# Altium PCB xbowtie.PcbDoc (part 1 of 3)
Units mil, origin at the board's own origin, x right, y up, seen from the top; angles counter-clockwise.
Board outline 3822.83 x 3919.29 mil, 4 copper layers (Top Layer, GND, POWER, Bottom Layer), stack 53.912 mil thick; 127 components, 86 nets, 452 pads, 412 vias.
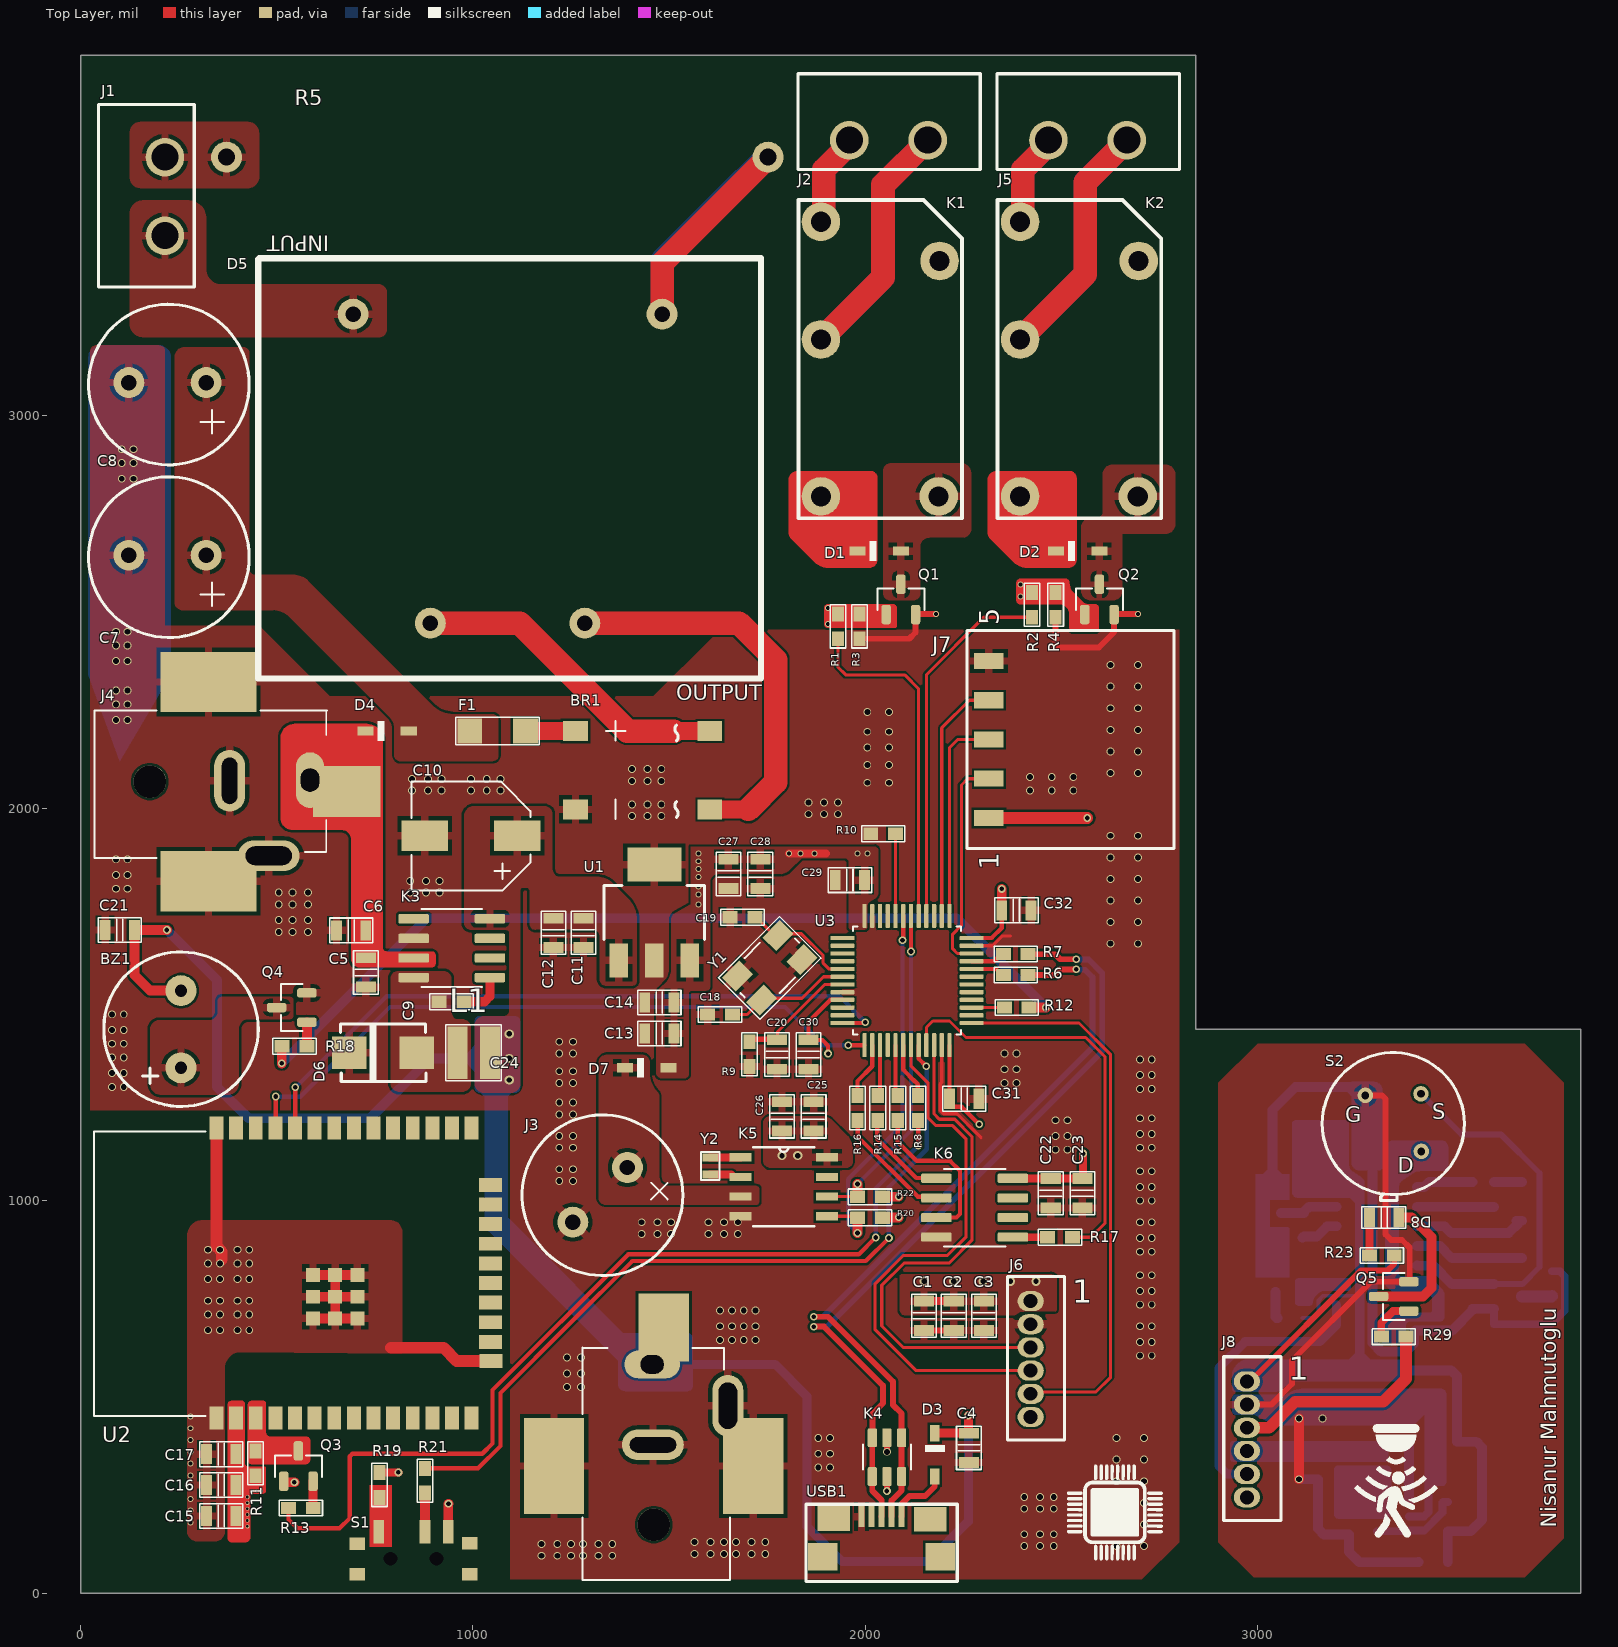
[diagram p0: Top Layer view]
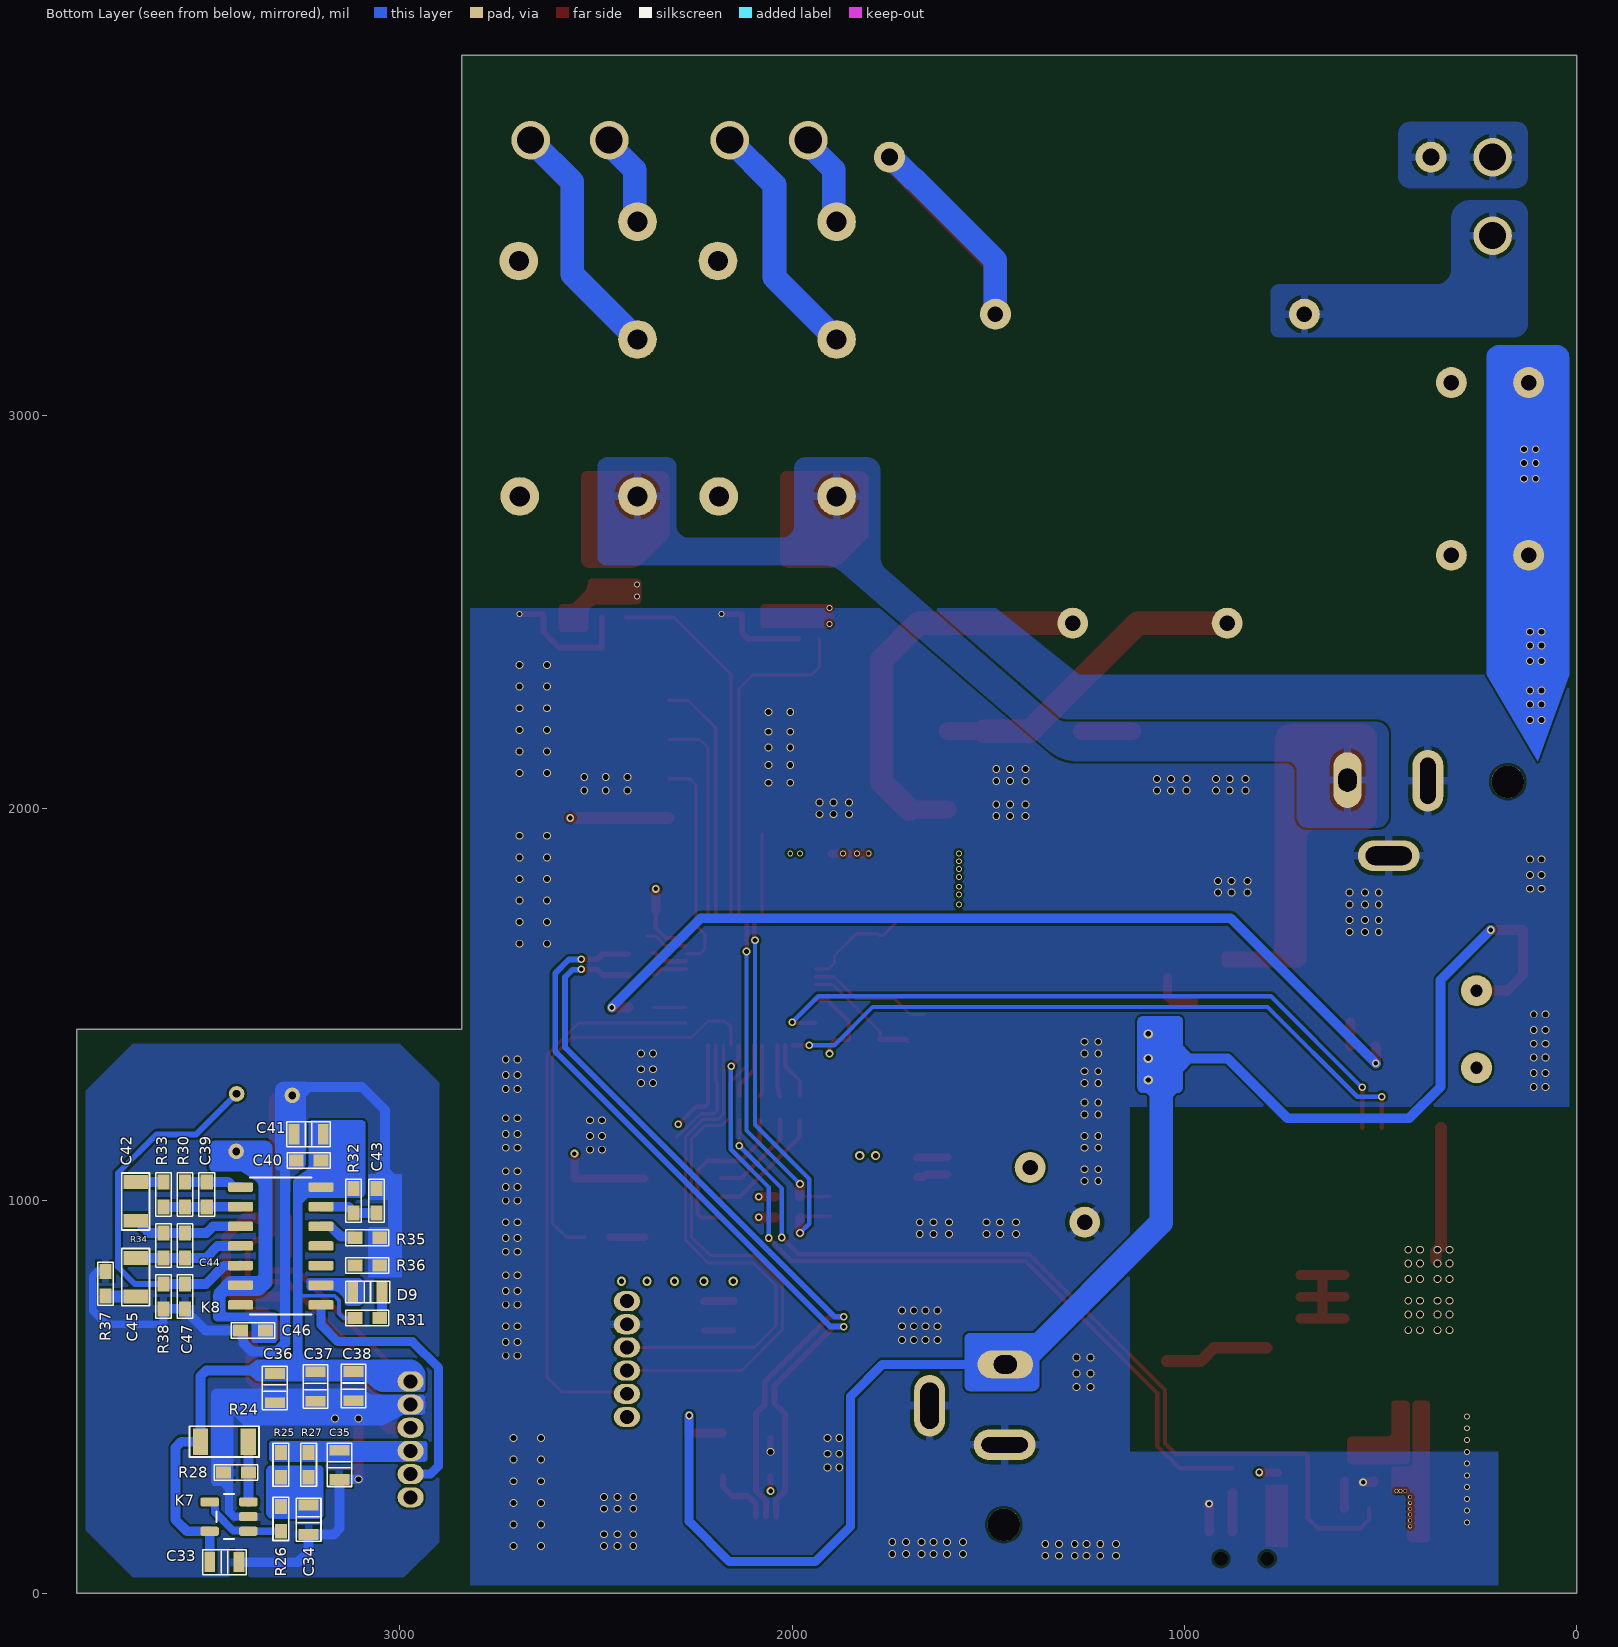
[diagram p1: Bottom Layer view, seen from below]
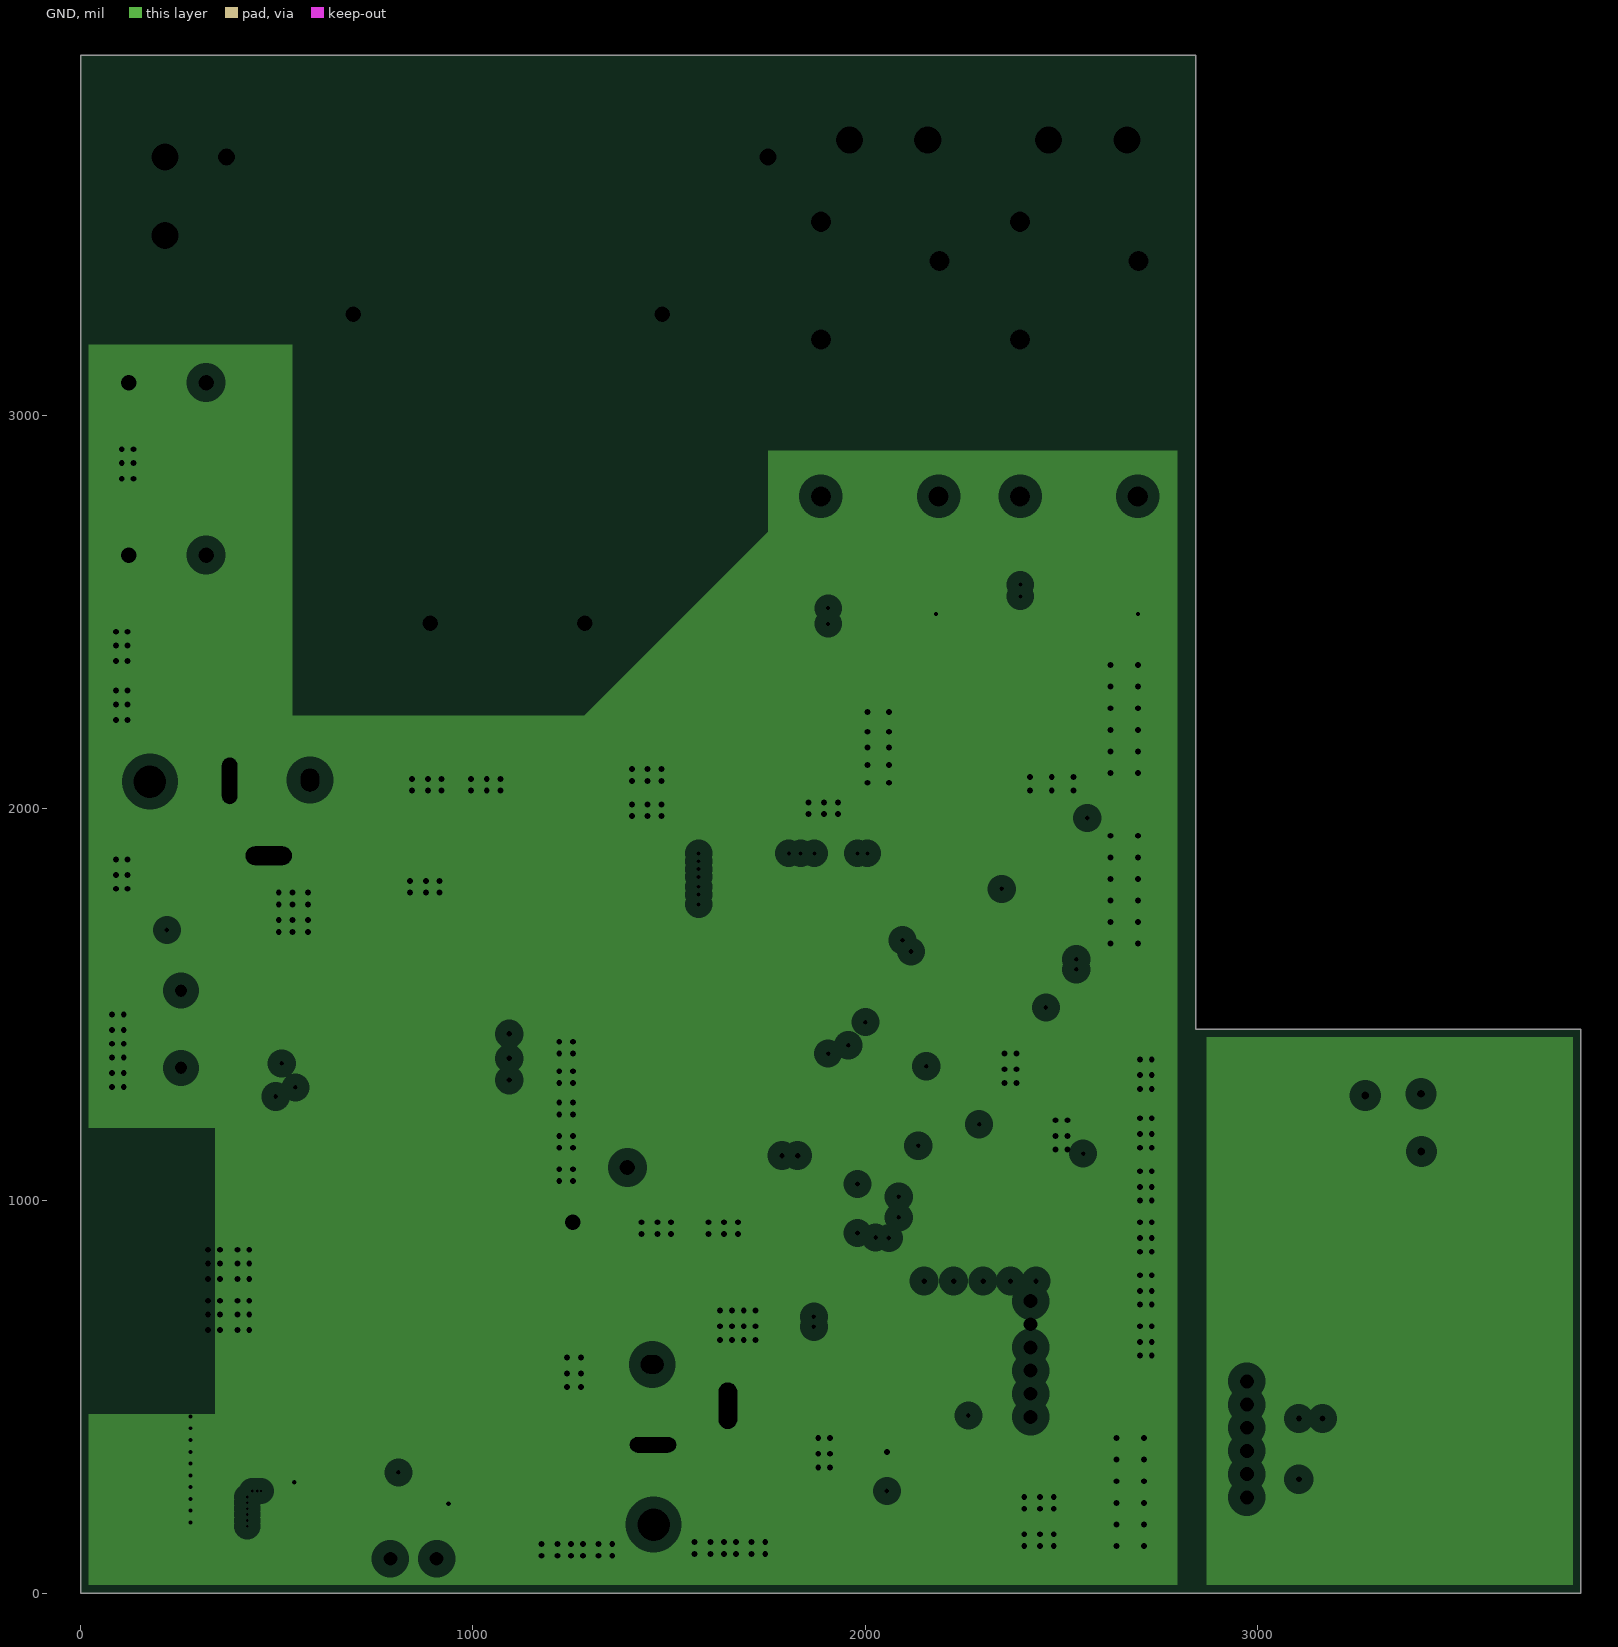
[diagram p2: GND, clearances drawn from the general rule]
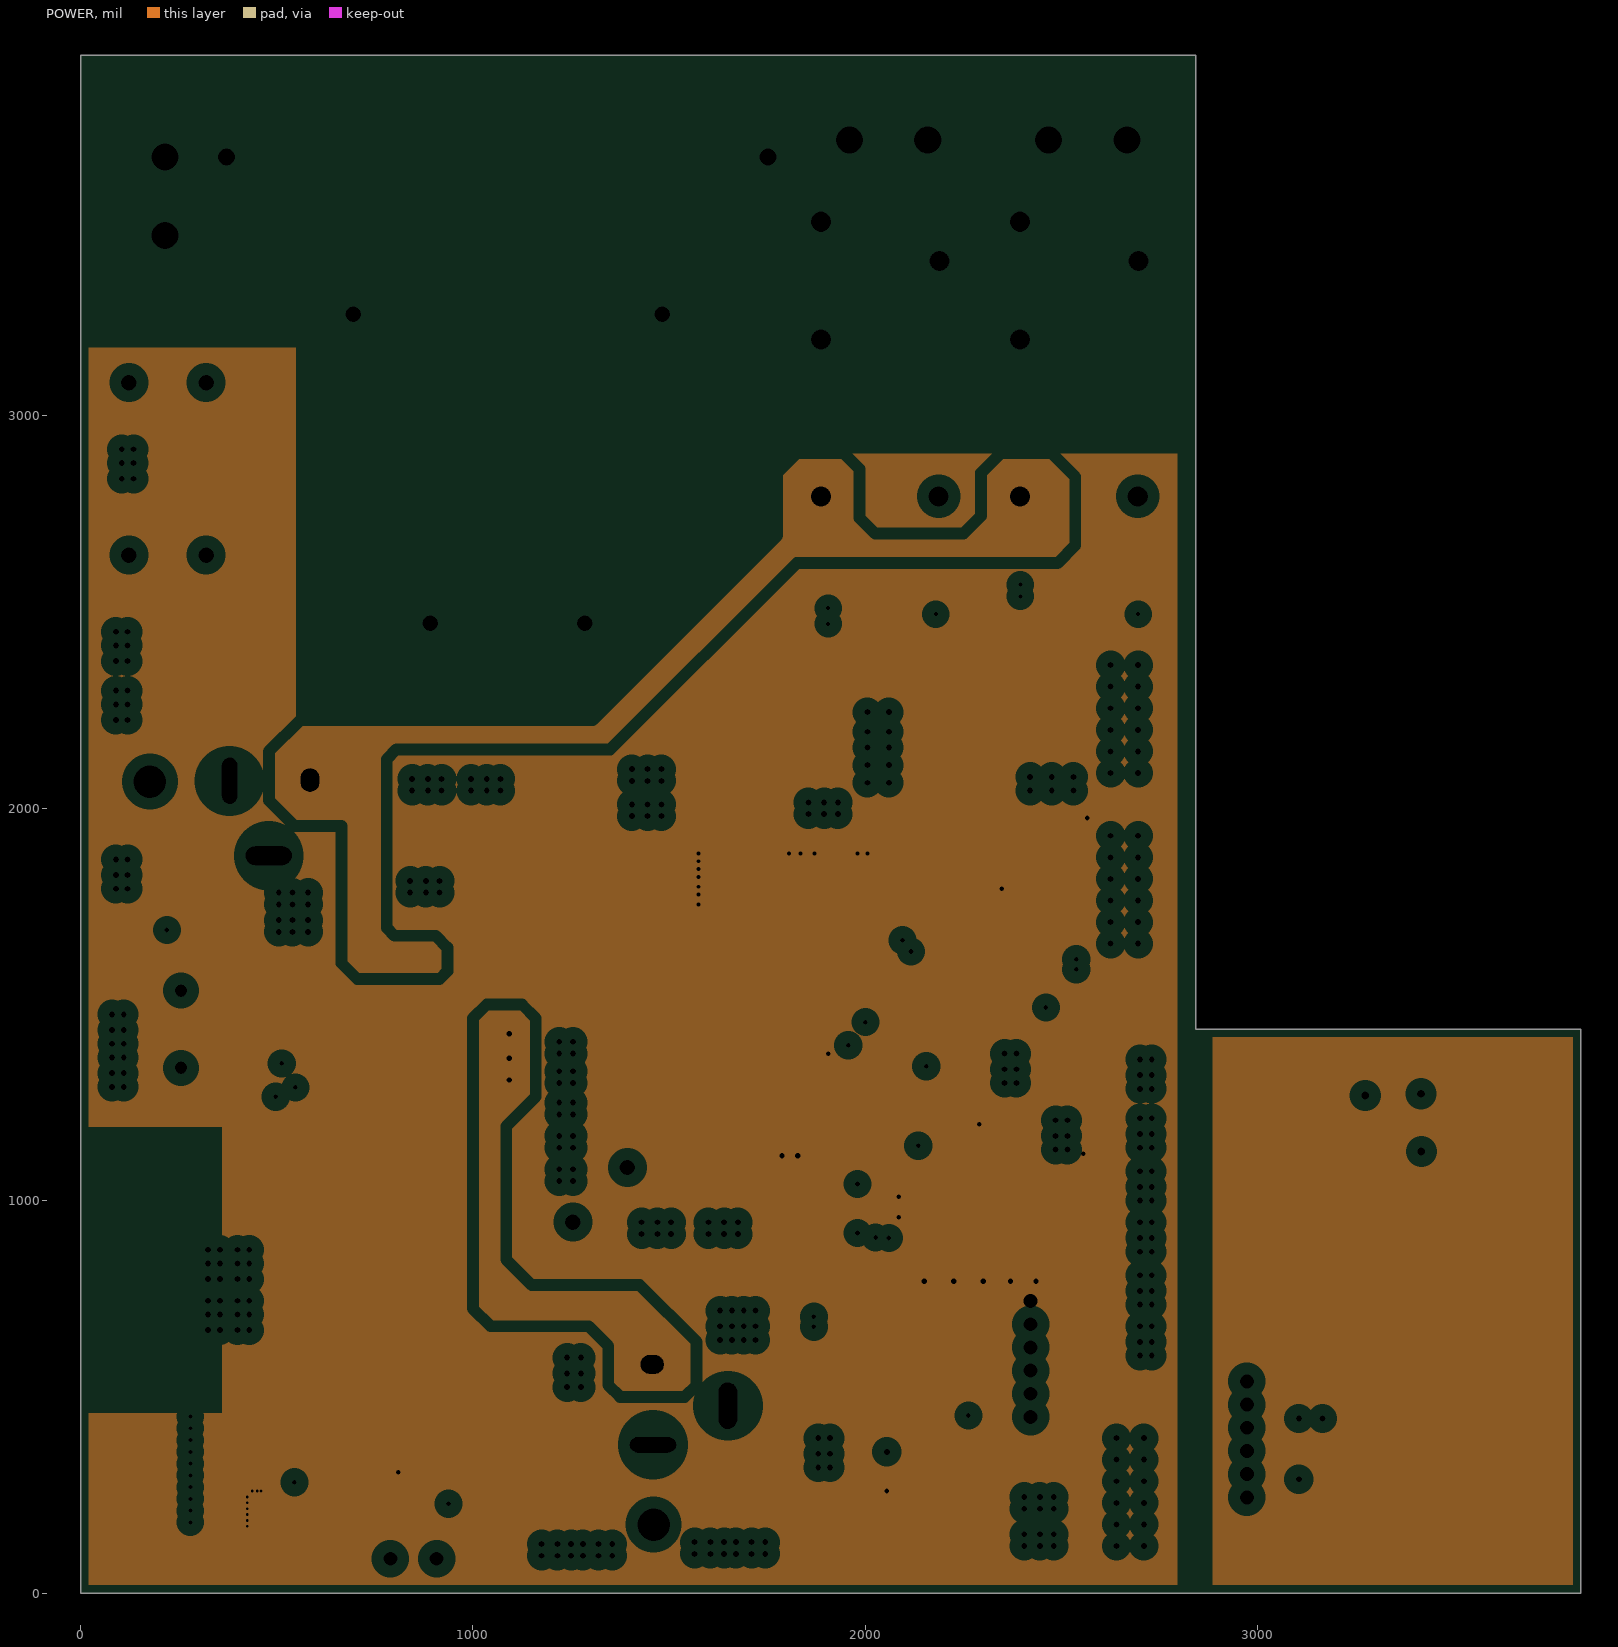
[diagram p3: POWER, clearances drawn from the general rule]
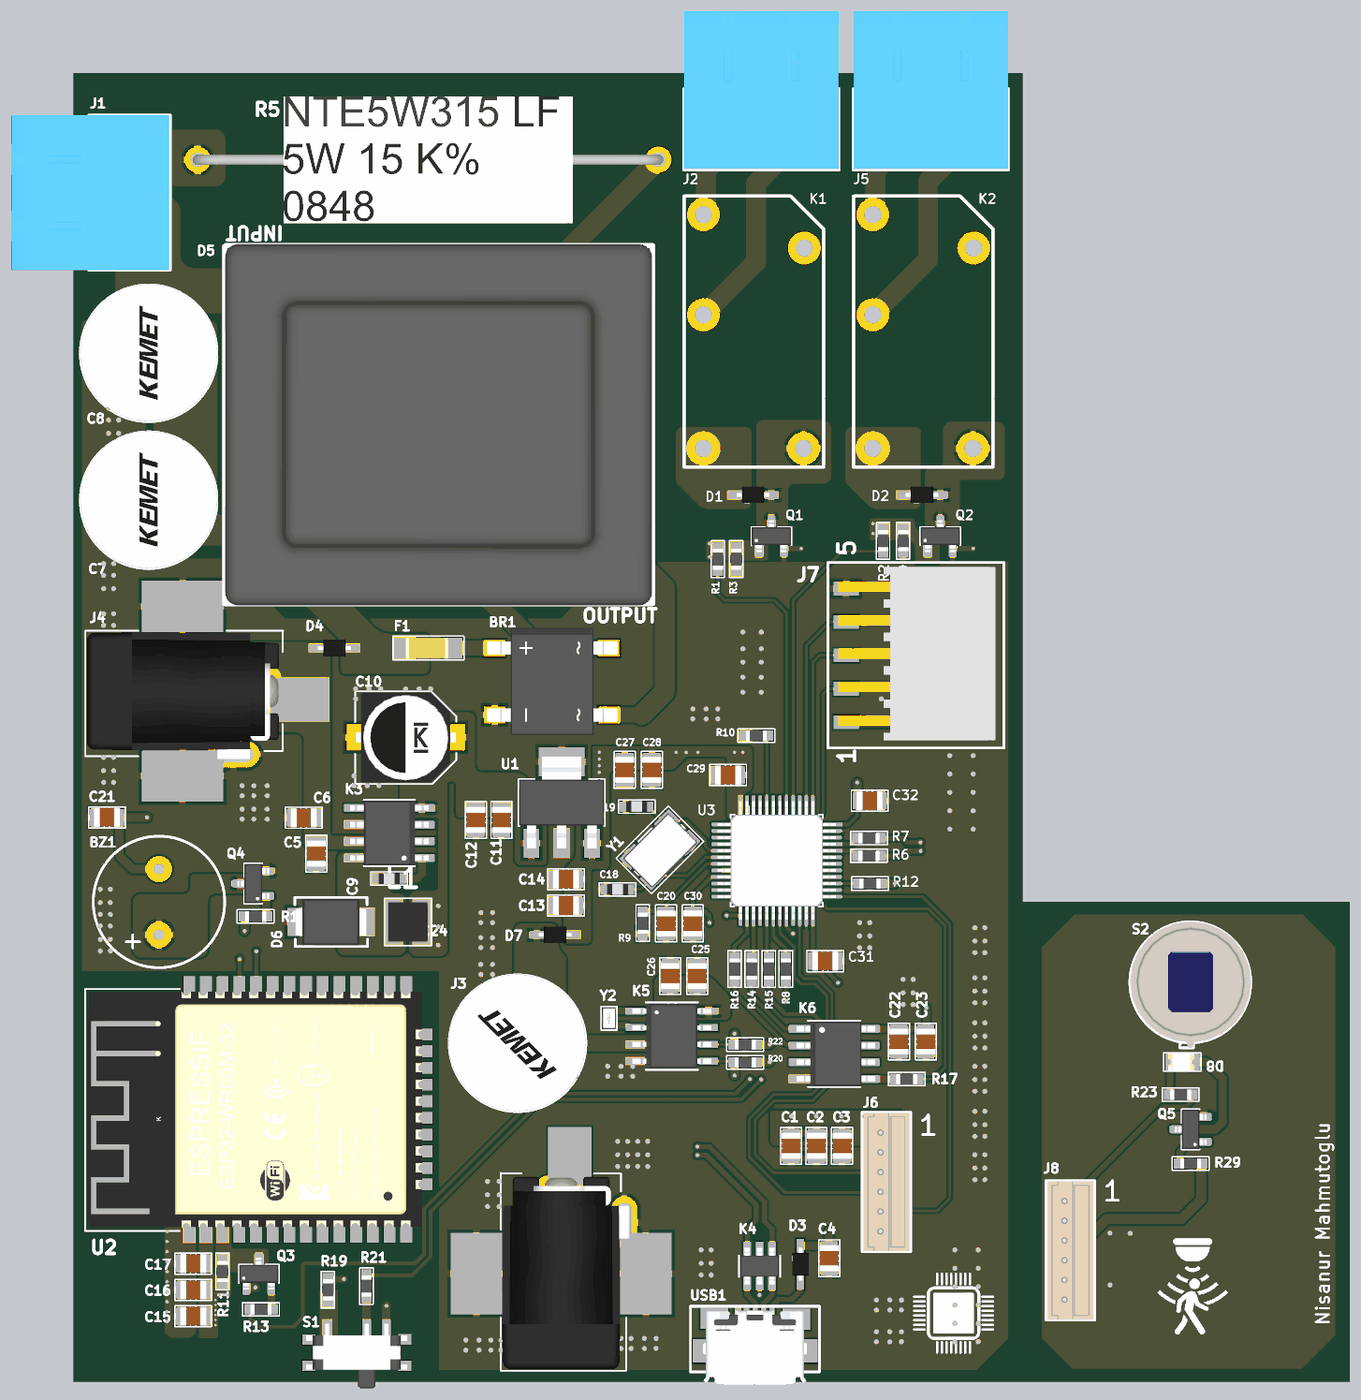
[diagram p5: 3D render of the assembled board from above, using the file's embedded part models]
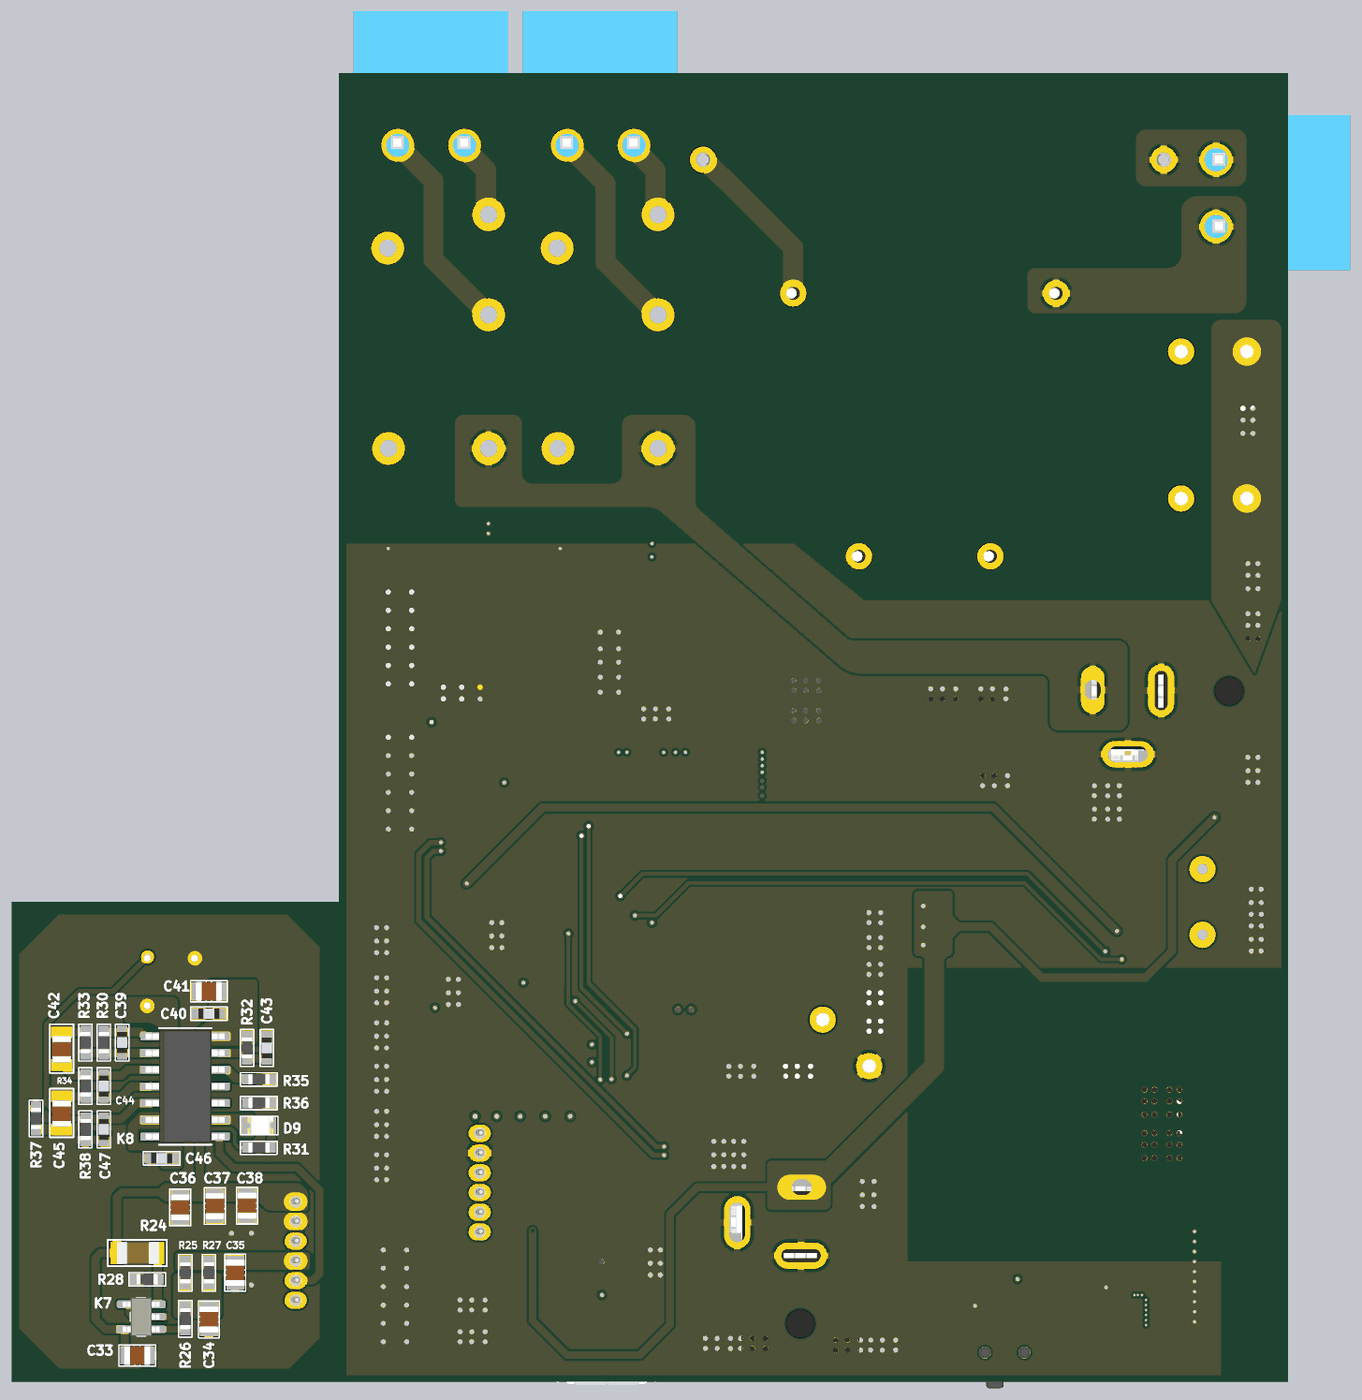
[diagram p6: 3D render of the assembled board from below, using the file's embedded part models]

## Layer stack, top to bottom
Top Solder: solder mask 1, SM-001, Dk 4
Top Layer: signal copper 1.378
Dielectric 1: prepreg 5.1, PP-017, Dk 4.3
Dielectric 2: prepreg 5.1, PP-017, Dk 4.3
GND: plane copper 1.378, net GND
Dielectric 3: core 28, Core-039, Dk 4.8
POWER: plane copper 1.378, net (Multiple Nets)
Dielectric 4: prepreg 5.1, PP-017, Dk 4.3
Dielectric 5: prepreg 5.1, PP-017, Dk 4.3
Bottom Layer: signal copper 1.378
Bottom Solder: solder mask 1, SM-001, Dk 4

## Board outline
0,0 3822.83,0 3822.83,1437.01 2842.52,1437.01 2842.52,3919.29 0,3919.29

## Design rules (kind name [scope] priority, off if disabled: settings)
Clearance [All] p1: gap=0 ignorepadtopadclearanceinfootprint=TRUE
ComponentClearance [All] p1: gap=5 collisioncheckmode=3 verticalgap=0 showdistances=FALSE
DiffPairsRouting [All] p1: maxlimit=10 minlimit=10 mostfreqgap=10 toplayer_minwidth=15 toplayer_maxwidth=15 toplayer_prefwidth=15 bottomlayer_minwidth=15 bottomlayer_maxwidth=15 bottomlayer_prefwidth=15 maxuncoupledlength=500
MinimumSolderMaskSliver [All] p1: minsoldermaskwidth=5
PlaneClearance [All] p1: clearance=30
PlaneConnect [All] p1: planeconnectstyle=Relief reliefexpansion=20 reliefentries=4 reliefconductorwidth=15 reliefairgap=10
PolygonConnect [All] p1: connectstyle=Relief reliefconductorwidth=20 reliefentries=4 polygonreliefangle="90 Angle" airgapwidth=10
RoutingVias [All] p1: holewidth=11.81 width=19.68 viastyle="Through Hole" minholewidth=9.84 minwidth=15.75 maxholewidth=28 maxwidth=50
SilkToSolderMaskClearance [IsPad] p1: minsilkscreentomaskgap=5 clearancetoexposedcopper=TRUE
SolderMaskExpansion [All] p1: expansion=1.99 istentingtop=FALSE
Width [All] p1: maxlimit=90 minlimit=8 preferedwidth=10 minimp=50.000000 maximp=50.000000 favimp=50.000000
24 further rules are at their usual default settings.

## Classes and differential pairs
component class xbowtie3: C33 C34 C35 C36 C37 C38 C39 C40 C41 C42 C43 C44 C45 C46 C47 D8 D9 J8 K7 K8 Q5 R23 R24 R25 R26 R27 R28 R29 R30 R31 R32 R33 R34 R35 R36 R37 R38 S2
component class xbowtie2: BZ1 C15 C16 C17 C18 C19 C20 C21 C22 C23 C24 C25 C26 C27 C28 C29 C30 C31 C32 D7 K4 K5 K6 Q3 Q4 R6 R7 R8 R9 R10 R11 R12 R13 R14 R15 R16 R17 R18 R19 R20 R21 R22 S1 U2 U3 Y1 Y2
component class xbowtie1: BR1 C1 C2 C3 C4 C5 C6 C7 C8 C9 C10 C11 C12 C13 C14 D1 D2 D3 D4 D5 D6 F1 J1 J2 J5 J6 J7 K1 K2 K3 L1 Q1 Q2 R1 R2 R3 R4 R5 U1 USB1
differential pair USB: +USB_P -USB_N

## Components (designator, comment, footprint, x,y, rotation, side; value= is the part's Value field where it differs from the comment)
BR1 "DB105STR" DB105STR 1603.78,1997.13 r90 top
BZ1 "CMI-9605IC-0580T" CMI-9605IC 255.91,1437.01 r180 top
C1 "4.7uF" "CAP_CER 0805" 2149.61,706.69 r90 top
C2 "4.7uF" "CAP_CER 0805" 2225.39,706.69 r90 top
C3 "CAP CER 1uF 0805" "CAP_CER 0805" 2302.17,706.69 r90 top
C4 "4.7uF" "CAP_CER 0805" 2263.78,370.08 r90 top
C5 "1uF" "CAP_CER 0805" 727,1581.6 r90 top
C6 "100nF" "CAP_CER 0805" 689.6,1689 r0 top
C7 "ESH477M050AH4AA" ESH477 320,2645 r180 top
C8 "ESH477M050AH4AA" ESH477 320,3085 r180 top
C9 "Comment" CAP_0603 945.16,1506.99 r180 top
C10 "68uF" "CAP ALU 68 UF" 995,1930 r180 top
C11 "CAP CER 1uF 0805" "CAP_CER 0805" 1281.77,1682.6 r90 top
C12 "100nF" "CAP_CER 0805" 1205,1682.6 r90 top
C13 "CAP CER 4.7uF 0805" "CAP_CER 0805" 1475.1,1426.26 r0 top
C14 "CAP CER 1uF 0805" "CAP_CER 0805" 1475.1,1505 r0 top
C15 "CAP CER 4.7uF 0805" "CAP_CER 0805" 358.6,196.52 r0 top
C16 "1uF" "CAP_CER 0805" 358.6,275.26 r0 top
C17 "100nF" "CAP_CER 0805" 358.6,354 r0 top
C18 "20pF" ? 1629.54,1474.41 r0 top
C19 "20pF" ? 1687,1722.44 r0 top
C20 "100nF" "CAP_CER 0805" 1775,1372.6 r270 top
C21 "100nF" "CAP_CER 0805" 100,1690 r0 top
C22 "100nF" "CAP_CER 0805" 2472.44,1018.9 r90 top
C23 "100nF" "CAP_CER 0805" 2553.15,1018.9 r90 top
C24 "ESH477M050AH4AA" ESH477 1393.7,1084.65 r225 top
C25 "100nF" "CAP_CER 0805" 1868.21,1214.9 r270 top
C26 "1uF" "CAP_CER 0805" 1787.5,1214.9 r270 top
C27 "CAP CER 4.7uF 0805" "CAP_CER 0805" 1650.94,1832.68 r90 top
C28 "1uF" "CAP_CER 0805" 1732.28,1832.68 r90 top
C29 "100nF" "CAP_CER 0805" 1960.63,1816.93 r0 top
C30 "100nF" "CAP_CER 0805" 1855,1372.6 r90 top
C31 "100nF" "CAP_CER 0805" 2251.97,1259.72 r180 top
C32 "100nF" "CAP_CER 0805" 2385,1740 r180 top
C33 "100nF" "CAP_CER 0805" 3446.85,78.74 r0 bottom
C34 "4.7uF" "CAP_CER 0805" 3232.28,187.01 r90 bottom
C35 "CAP CER 1uF 0805" "CAP_CER 0805" 3153.54,326.77 r90 bottom
C36 "4.7uF" "CAP_CER 0805" 3318.54,522.52 r90 bottom
C37 "4.7uF" "CAP_CER 0805" 3214.53,526.46 r90 bottom
C38 "CAP CER 1uF 0805" "CAP_CER 0805" 3118.11,527.56 r90 bottom
C39 "10nF" ? 3492.13,1015.75 r90 bottom
C40 "CAP CER 100nF 0603" ? 3232.29,1102.36 r180 bottom
C41 "CAP CER 1uF 0805" "CAP_CER 0805" 3232.41,1169.29 r180 bottom
C42 "33uF" "CAP 1206" 3673.23,948.82 r90 bottom
C43 "CAP CER 100nF 0603" ? 3059.06,1000 r270 bottom
C44 "10nF" ? 3547.24,885.83 r270 bottom
C45 "33uF" "CAP 1206" 3673.23,755.91 r90 bottom
C46 "CAP CER 100nF 0603" ? 3374.01,669.29 r180 bottom
C47 "CAP CER 100nF 0603" ? 3547.24,755.9 r90 bottom
D1 "1N4148WS" 1N4148WS 2035.43,2655.51 r0 top
D2 "1N4148WS" 1N4148WS 2541.34,2655.51 r0 top
D3 "1N4148WS" 1N4148WS 2177.17,352.36 r270 top
D4 "1N4148WS" 1N4148WS 781.5,2196.85 r0 top
D5 "BV302S12010_ZU" BV302S 1088.23,2865.59 r0 top
D6 "1SMB5919BT3G" 1SMB5919BT3G 770.98,1377 r0 top
D7 "1N4148WS" 1N4148WS 1442.91,1338.58 r0 top
D8 "LED RED 0805" "LED 805" 3322.4,957.5 r180 top
D9 "LED GREEN" "LED 805" 3082.56,767.72 r180 bottom
F1 "FUSE 3413.0216.22" "FUSE 3413.0216.22" 1133.78,2197.13 r180 top
J1 "TBP01R1-508-02BE" TBP01R1-508 215,3559.29 r270 top
J2 "TBP01R1-508-02BE" TBP01R1-508 2059.06,3702.76 r180 top
J3 "Comment" JACK 1474.41,344.49 r90 top
J4 "Comment" JACK 346.54,2054.25 r0 top
J5 "TBP01R1-508-02BE" TBP01R1-508 2566.54,3702.76 r180 top
J6 "64800611622" 64800611622 2421.26,596.46 r270 top
J7 "SMH-105-02-LS" "5 PIN CONNECTOR" 2534.42,2175.41 r90 top
J8 "64800611622" 64800611622 2972.44,391.73 r270 top
K1 "ALQ112" ALQ112 2037.99,3144.88 r90 top
K2 "ALQ112" ALQ112 2545.47,3144.88 r90 top
K3 "LM2675MX-12/NOPB" LM2675MX-12/NOPB 946.06,1643.5 r180 top
K4 "USBLC6-2SC6" USBLC6-2SC6 2055.12,346.46 r270 top
K5 "M41T00M6F" M41T00M6F 1789.37,1035.43 r0 top
K6 "MAX6662" "MAKSİMUMA 6662MSA+" 2278.54,982.09 r0 top
K7 "OPA314AIDBVR" OPA314AIDBVR 3435.24,194.88 r0 bottom
K8 "NCS36000DRG" NCS36000DRG 3303.35,884.65 r180 bottom
L1 "78438335470" IND_1212 1001.66,1377 r0 top
Q1 "MMBT3904-7-F" MMBT3904-7-F 2090.55,2532.28 r90 top
Q2 "MMBT3904-7-F" MMBT3904-7-F 2596.46,2532.28 r90 top
Q3 "MMBT3904-7-F" MMBT3904-7-F 555.12,323.62 r90 top
Q4 "MMBT3904-7-F" MMBT3904-7-F 538.19,1492.13 r180 top
Q5 "MMBT3904-7-F" MMBT3904-7-F 3346.46,755.91 r180 top
R1 "1K" RES_0603 1930,2463.5 r90 top
R2 "1K" RES_0603 2425,2518.5 r90 top
R3 "10K" RES_0603 1985,2463.5 r90 top
R4 "10K" RES_0603 2485,2518.5 r90 top
R5 "5WD27" 5WD27 372.05,3659.45 r0 top
R6 "15R" RES_0603 2383.11,1575.39 r0 top
R7 "15R" RES_0603 2383.11,1628.54 r0 top
R8 "100R" RES_0603 2133.86,1236.22 r270 top
R9 "100R" RES_0603 1705,1373.5 r90 top
R10 "100R" RES_0603 2045.27,1935.04 r0 top
R11 "1K" RES_0603 446,330.5 r90 top
R12 "100R" RES_0603 2385.83,1492.13 r0 top
R13 "100R" RES_0603 561.5,217 r0 top
R14 "100R" RES_0603 2031.5,1236.22 r90 top
R15 "100R" RES_0603 2082.68,1236.22 r90 top
R16 "100R" RES_0603 1980.32,1236.22 r90 top
R17 "100R" RES_0603 2495.94,906.69 r0 top
R18 "100R" RES_0603 545.27,1393.7 r0 top
R19 "100R" RES_0603 761.81,275.59 r90 top
R20 "4K7R" RES_0603 2011.82,956.69 r0 top
R21 "100R" RES_0603 877.5,286.5 r270 top
R22 "4K7R" RES_0603 2011.82,1009.84 r0 top
R23 "100R" RES_0603 3316.5,860 r0 top
R24 "TFPT1206L1002FM" TFPT1206L1002FM 3444.88,385.83 r0 bottom
R25 "220K" RES_0603 3303.15,326.77 r90 bottom
R26 "1K" RES_0603 3303.15,188.97 r90 bottom
R27 "220K" RES_0603 3232.28,326.77 r90 bottom
R28 "10K" RES_0603 3417.33,307.09 r0 bottom
R29 "1K" RES_0603 3346.46,653.54 r180 top
R30 "560K" RES_0603 3547.24,1015.75 r90 bottom
R31 "1K" RES_0603 3082.68,700.79 r0 bottom
R32 "220K" RES_0603 3118.11,1000 r90 bottom
R33 "10K" RES_0603 3602.36,1015.75 r270 bottom
R34 "560K" RES_0603 3602.36,885.82 r90 bottom
R35 "0R" RES_0603 3082.67,905.51 r0 bottom
R36 "0R" RES_0603 3082.67,834.65 r0 bottom
R37 "10K" RES_0603 3750,788.5 r270 bottom
R38 "43K" RES_0603 3602.36,755.9 r90 bottom
S1 "EG1215AA" EG1215AA 848.44,87.5 r0 top
S2 "LHI 878/3902" "LHI 878" 3345,1197.5 r0 top
U1 "AP7361-33E-13" AP7361-33E-13 1462.32,1734.49 r90 top
U2 "ESP32-WROOM-32E (4MB)" ESP32-32E 696.06,813.78 r90 top
U3 "STM32F103C6T6A" STM32 2106.3,1561.02 r0 top
USB1 "10118192-0001LF" MICRO_B_USB 2041.34,194.88 r0 top
Y1 "CRYSTAL 16MHz" ECS 1756.46,1593.29 r45 top
Y2 "CRYSTAL 32.7680KHZ 12.5PF SMD" ABS05 1604.33,1088.58 r90 top

## Footprints (in the part's own frame and the unit in brackets; to place one, negate y for a bottom-side part, rotate by r counter-clockwise, add the part's x,y. Pads: shape width x height; smd on the part's side, far side on the other; paste and mask are expansions set on the pad)
1N4148WS [mm]
  rect 1.05x0.6 smd: 1(-1.4,0) 2(1.4,0)
  silkscreen extent -0.63,-0.63 -0.2,0.63, body extent -1.25,-0.62 1.25,0.64, height 1
1SMB5919BT3G [mm]
  rect 2.25x2.12 smd mask+0.05: 1(-2.185,0) 2(2.185,0)
  silkscreen extent -2.75,-1.87 2.79,1.87, body extent -2.72,-1.78 2.72,1.78, height 2.49
"5 PIN CONNECTOR" [mm]
  rect 1.04x1.91 smd mask+0: 1(-5.08,5.577) 2(-2.54,5.577) 3(0,5.577) 4(2.54,5.577) 5(5.08,5.577)
  silkscreen extent -7.05,-6.4 7.05,6.98, body extent -6.48,-5.76 6.73,6.17, height 2.45
5WD27 [mm]
  round 2 hole 1.1 paste-2539.97 mask+0.076: 1(0,0) 2(35.052,0)
  body extent -0.37,-4.82 35.43,4.83, height 10.07
64800611622 [mm]
  oval 1.3x1.7 hole 0.9 mask+0.05: 1(-3.75,0) 2(-2.25,0) 3(-0.75,0) 4(0.75,0) 5(2.25,0) 6(3.75,0)
  silkscreen extent -5.35,-1.5 5.25,2.2, body extent -5.3,-1.4 5.2,2.1, height 4.55
ABS05 [mm]
  rect 0.5x1 smd mask+0.05: 1(-0.55,0) 2(0.55,0)
  silkscreen extent -0.9,-0.6 0.9,0.6, body extent -0.8,-0.5 0.8,0.5, height 0.5
ALQ112 [mm]
  round 2.5 hole 1.3 mask+0.05: 1(6.35,-3.84) 2(1.27,3.84) 3(8.89,3.84) 4(-8.89,-3.78) 5(-8.89,3.84)
  silkscreen extent -10.3,-5.3 10.3,5.3, body extent -10.1,-4.9 9.9,5.1, height 15.6
AP7361-33E-13 [mm]
  rect 2.2x1.2 smd: 1(-3.1,2.3) 2(-3.1,0) 3(-3.1,-2.3)
  rect 2.2x3.5 smd: ""(3.1,0)
  silkscreen extent -1.75,-3.25 1.75,3.25, body extent -3.5,-3.25 3.5,3.25, height 1.65
BV302S [mm]
  round 2 hole 1 mask+0.05: 1(10,10) 5(-10,10) 7(-5,-10) 9(5,-10)
  silkscreen extent -16.14,-13.59 16.41,13.62, body extent -16.12,-13.74 16.38,13.76, height 21.8
"CAP 1206" [mm]
  rect 0.9x1.6 smd paste-2539.97 mask+0.05: 1(0,0) 2(2.5,0)
  silkscreen extent -0.6,-0.9 3.1,0.9, body extent 0.2,-0.72 2.2,0.72, height 1.24
"CAP ALU 68 UF" [mm]
  rect 3x2 smd paste-2539.97 mask+0.076: 1(-3,0) 2(3,0)
  silkscreen extent -3.85,-3.5 3.85,3.55, body extent -3.8,-3.37 3.8,3.43, height 5.66
CAP_0603 [mil]
  rect 38x31 smd mask+1.97: 1(-31.5,0) 2(31.5,0)
  silkscreen extent -55,-20 55,20, body extent -31,-16 32,16, height 31
"CAP_CER 0805" [mm]
  rect 0.7x1.3 smd mask+0.05: 1(-0.95,0) 2(0.95,0)
  silkscreen extent -1.4,-0.8 1.4,0.8, body extent -1,-0.72 1,0.72, height 1.23
CMI-9605IC [mm]
  round 2 hole 0.8 mask+0.05: 1(0,2.5) 2(0,-2.5)
  silkscreen extent -5,-5 5,5, body extent -4.8,-4.8 4.8,5.4, height 5.2
DB105STR [mm]
  rect 1.3x1.6 smd paste-2539.97 mask+0.076: 1(5.08,0) 2(0,0) 3(5.08,8.7) 4(0,8.7)
  silkscreen extent -0.64,2.05 5.71,6.73, body extent -1.54,-0.63 6.62,9.27, height 2.7
ECS [mm]
  rect 1.6x1.25 smd: 1(-1.85,-1.1) 2(1.85,-1.1) 3(1.85,1.1) 4(-1.85,1.1)
  silkscreen extent -2.8,-1.9 2.8,1.9, body extent -2.5,-1.65 2.5,1.55, height 0.85
EG1215AA [mm]
  round 0 hole 0.9 mask+0.05: 0(-1.5,0) 0(1.5,0)
  rect 0.7x1.5 smd mask+0.05: 1(-2.25,1.75) 2(0.75,1.75) 3(2.25,1.75)
  rect 1x0.8 smd mask+0.05: "  "(-3.65,-1) "  "(-3.65,0.981) "  "(3.65,-1) "  "(3.65,1)
  body extent -3.85,-2.7 3.85,2.2, height 1.4
ESH477 [mm]
  round 2 hole 1 paste-2539.97 mask+0.076: 1(0,0) 2(5,0)
  silkscreen extent -2.79,-5.07 7.61,5.33, body extent -2.84,-5.17 7.66,5.33, height 22.07
ESP32-32E [mm]
  rect 1.5x0.9 smd mask+0.05: 1(-9.33,8.88) 1(-9.33,8.88) 2(-9.33,7.61) 2(-9.33,7.61) 3(-9.33,6.34) 3(-9.33,6.34) 4(-9.33,5.07) 4(-9.33,5.07) 5(-9.33,3.8) 5(-9.33,3.8) 6(-9.33,2.53) 6(-9.33,2.53) 7(-9.33,1.26) 7(-9.33,1.26) 8(-9.33,-0.01) 8(-9.33,-0.01) 9(-9.33,-1.28) 9(-9.33,-1.28) 10(-9.33,-2.55) 10(-9.33,-2.55) 11(-9.33,-3.82) 11(-9.33,-3.82) 12(-9.33,-5.09) 12(-9.33,-5.09) 13(-9.33,-6.36) 13(-9.33,-6.36) 14(-9.33,-7.63) 14(-9.33,-7.63) 25(9.43,-7.63) 26(9.43,-6.36) 27(9.43,-5.09) 28(9.43,-3.82) 29(9.43,-2.55) 30(9.43,-1.28) 31(9.43,-0.01) 32(9.43,1.26) 33(9.43,2.53) 34(9.43,3.8) 35(9.43,5.07) 36(9.43,6.34) 37(9.43,7.61) 38(9.43,8.88)
  rect 0.9x1.5 smd mask+0.05: 15(-5.65,-8.88) 16(-4.41,-8.86) 17(-3.14,-8.86) 18(-1.87,-8.86) 19(-0.6,-8.86) 20(0.67,-8.86) 21(1.94,-8.86) 22(3.21,-8.86) 23(4.48,-8.86) 24(5.75,-8.86)
  rect 0.9x0.9 smd mask+0.05: 39(-2.89,1.2) 40(-1.49,1.2) 41(-0.09,1.2) 42(-2.896,-0.233) 43(-1.49,-0.233) 44(-0.09,-0.233) 45(-2.89,2.633) 46(-1.49,2.633) 47(-0.09,2.633)
  silkscreen extent -9.2,9.6 9.2,16.8, body extent -8.9,-8.85 9,16.55, height 2.61
"FUSE 3413.0216.22" [mm]
  rect 1.6x1.6 smd mask+0.05: 1(0,0) 2(3.6,0)
  silkscreen extent -0.9,-0.9 4.5,0.9, body extent 0.31,-0.8 3.5,0.8, height 0.6
IND_1212 [mm]
  rect 1.3x3.4 smd mask+0.05: 1(-1.05,0) 2(1.05,0)
  silkscreen extent -1.8,-1.8 1.8,1.8, body extent -1.5,-1.5 1.5,1.5, height 1.2
JACK [mm]
  rect 4.4x3.3 smd: 1A(8.428,-0.3)
  oval 1.8x3.6 hole 1.2 slot 1.5 at 90 deg: 1B(6.05,0.45)
  rect 6.2x3.9 smd: 2A(-0.522,6.8) 3A(-0.522,-6.1)
  oval 2x4 hole 1 slot 3 at 90 deg: 2B(0.85,0.4)
  oval 4x2 hole 1.2 slot 3 at 0 deg: 3B(3.378,-4.45)
  round 2.1 hole 2.1 unplated: ""(-4.322,0.35)
  silkscreen extent -7.9,-4.6 7.15,4.95, body extent -7.78,-4.93 6.84,4.84, height 10.38
"LED 805" [mm]
  rect 0.7x1.3 smd mask+0.05: 1(-0.95,0) 2(0.95,0)
  silkscreen extent -1.4,-0.7 1.45,0.7, body extent -0.9,-0.65 1.1,0.65, height 0.8
"LHI 878" [mm]
  round 1 hole 0.5: 1(1.83,-1.825) 2(1.8,1.9) 3(-1.8,1.8)
  silkscreen extent -4.59,-5.01 4.61,4.57, body extent -4.56,-5.03 4.64,4.6, height 4.6
LM2675MX-12/NOPB [mm]
  rrect25% 1.97x0.6 smd: 1(-2.47,1.905) 2(-2.47,0.635) 3(-2.47,-0.635) 4(-2.47,-1.905) 5(2.47,-1.905) 6(2.47,-0.635) 7(2.47,0.635) 8(2.47,1.905)
  silkscreen extent -1.95,-2.52 1.95,2.52, body extent -3,-2.45 3,2.45, height 1.83
M41T00M6F [mil]
  rect 56x21 smd: 1(-107.13,75) 2(-107.13,25) 3(-107.13,-25) 4(-107.13,-75) 5(112.87,-75) 6(112.87,-25) 7(112.87,25) 8(112.87,75)
  silkscreen extent -75,-101 81,101, body extent -115,-96 121,96, height 69
"MAKSİMUMA 6662MSA+" [mm]
  rrect25% 1.97x0.59 smd: 1(-2.475,1.905) 2(-2.475,0.635) 3(-2.475,-0.635) 4(-2.475,-1.905) 5(2.475,-1.905) 6(2.475,-0.635) 7(2.475,0.635) 8(2.475,1.905)
  silkscreen extent -2,-2.52 2,2.52, body extent -2.87,-2.45 3.13,2.45, height 1.75
MICRO_B_USB [mm]
  rect 0.4x1.35 smd mask+0.05: 1(1.3,0) 2(0.65,0) 3(0,0) 4(-0.65,0) 5(-1.3,0)
  rect 1.9x1.8 smd mask+0.05: ""(-3.8,-2.6) ""(3.8,-2.6)
  rect 2.1x1.6 smd mask+0.05: ""(-3.1,-0.122) ""(-3.1,-0.122) ""(3.151,-0.175)
  silkscreen extent -4.9,-4.2 4.9,0.8, body extent -3.96,-5.2 3.96,0.47, height 2.56
MMBT3904-7-F [mm]
  rrect50% 1.26x0.61 smd: B(-0.98,0.95) C(0.98,0) E(-0.98,-0.95)
  silkscreen extent -0.7,-1.53 0.7,1.53, body extent -1.21,-1.5 1.21,1.5, height 1.12
NCS36000DRG [mm]
  rrect25% 1.6x0.61 smd: 1(-2.605,3.81) 2(-2.605,2.54) 3(-2.605,1.27) 4(-2.605,0) 5(-2.605,-1.27) 6(-2.605,-2.54) 7(-2.605,-3.81) 8(2.605,-3.81) 9(2.605,-2.54) 10(2.605,-1.27) 11(2.605,0) 12(2.605,1.27) 13(2.605,2.54) 14(2.605,3.81)
  silkscreen extent -2,-4.44 2,4.44, body extent -3,-4.28 3,4.28, height 1.76
OPA314AIDBVR [mm]
  rrect50% 1.21x0.59 smd: 1(-1.255,0.95) 2(-1.255,0) 3(-1.255,-0.95) 4(1.255,-0.95) 5(1.255,0.95)
  silkscreen extent -0.33,-1.45 0.8,1.45, body extent -1.4,-1.45 1.4,1.45, height 1.45
RES_0603 [mil]
  rect 38x31 smd mask+1.97: 1(-31.5,0) 2(31.5,0)
  silkscreen extent -55,-20 55,20, body extent -31,-16 31,15, height 18
STM32 [mm]
  rrect50% 1.56x0.28 smd: 1(-4.18,2.75) 2(-4.18,2.25) 3(-4.18,1.75) 4(-4.18,1.25) 5(-4.18,0.75) 6(-4.18,0.25) 7(-4.18,-0.25) 8(-4.18,-0.75) 9(-4.18,-1.25) 10(-4.18,-1.75) 11(-4.18,-2.25) 12(-4.18,-2.75) 25(4.18,-2.75) 26(4.18,-2.25) 27(4.18,-1.75) 28(4.18,-1.25) 29(4.18,-0.75) 30(4.18,-0.25) 31(4.18,0.25) 32(4.18,0.75) 33(4.18,1.25) 34(4.18,1.75) 35(4.18,2.25) 36(4.18,2.75)
  rrect50% 0.28x1.56 smd: 13(-2.75,-4.18) 14(-2.25,-4.18) 15(-1.75,-4.18) 16(-1.25,-4.18) 17(-0.75,-4.18) 18(-0.25,-4.18) 19(0.25,-4.18) 20(0.75,-4.18) 21(1.25,-4.18) 22(1.75,-4.18) 23(2.25,-4.18) 24(2.75,-4.18) 37(2.75,4.18) 38(2.25,4.18) 39(1.75,4.18) 40(1.25,4.18) 41(0.75,4.18) 42(0.25,4.18) 43(-0.25,4.18) 44(-0.75,4.18) 45(-1.25,4.18) 46(-1.75,4.18) 47(-2.25,4.18) 48(-2.75,4.18)
  silkscreen extent -3.5,-3.5 3.5,3.5, body extent -4.5,-4.5 4.5,4.5, height 1.59
TBP01R1-508 [mm]
  round 2.5 hole 1.75 mask+0.05: 1(-2.54,0) 2(2.54,0)
  silkscreen extent -5.94,-4.3 5.86,1.9, body extent -5.92,-10.2 5.84,1.8, height 8.5
TFPT1206L1002FM [mm]
  rect 1x1.7 smd paste-2539.97 mask+0.076: 1(-1.5,0) 2(1.6,0)
  silkscreen extent -2.2,-1 2.3,1, body extent -1.6,-0.83 1.6,0.83, height 0.66
USBLC6-2SC6 [mm]
  rrect25% 1.21x0.59 smd: 1(-1.255,0.95) 2(-1.255,0) 3(-1.255,-0.95) 4(1.255,-0.95) 5(1.255,0) 6(1.255,0.95)
  silkscreen extent -0.81,-1.57 0.81,1.57, body extent -1.4,-1.46 1.4,1.46, height 1.43
? [mil]
  rect 38x31 smd mask+1.97: 1(-31.5,0) 1(31.5,0)
  silkscreen extent -55,-20 55,20, body extent -31,-16 32,16, height 31

## Part data
BZ1: "Audio Buzzer Magnetic 3VDC 7VDC 30mA 5VDC 85dB 2600Hz to 2800Hz Through Hole Pin Box", Manufacturer="CUI Devices", Supplier Part Number 1=2223-CMI-9605IC-0580T-ND, Category="Audio Products", Height=5mm, Length=9.6mm, Manufacturer Part Number=CMI-9605IC-0580T, Pricing 1="1=1,22, 10=1,014, 25=0,938, 50=0,883, 100=0,8298, 250=0,76976, 500=0,71396, 1000=0,66741, 5000=0,65403 (USD)", RoHS=No, Shape=4456Shape, Stock 1=5449, Supplier 1=Digikey, Width=9.6mm
C1 C2 C4 C34 C36 C37: library part "CAP CER 4.7uF 0805", "CAP CER 4.7uF 0805", Case Code (Metric)=2012, Case Code (Imperial)=0805, Dielectric=X5R, Manufacturer=Samsung, Manufacturer Part Number=CL21A475KBQNNNE, Max Operating Temperature=85°C, Min Operating Temperature=-55°C, Package Quantity=1, Supplier Part Number 1=1276-1248-1-ND, Tolerance=10%, Voltage Rating=50V, Capacitance=4.7uF, Case/Package=0805, Category="Ceramic Capacitors", ComponentLink1Description=https://datasheet.ciiva.com/25797/cl21a475kbqnnne-25797730.pdf?src-supplier=Digikey, ComponentLink1URL=https://datasheet.ciiva.com/25797/cl21a475kbqnnne-25797730.pdf?src-supplier=Digikey, ComponentLink2Description=https://datasheet.ciiva.com/16428/cl21a475kbqnnne-16428877.pdf?src-supplier=Future+Electronics, ComponentLink2URL=https://datasheet.ciiva.com/16428/cl21a475kbqnnne-16428877.pdf?src-supplier=Future+Electronics, ComponentLink3Description=https://datasheet.ciiva.com/26838/getdatasheetpartid-470982-26838620.pdf?src-supplier=Verical, ComponentLink3URL=https://datasheet.ciiva.com/26838/getdatasheetpartid-470982-26838620.pdf?src-supplier=Verical, Depth=1.25mm, Length=2mm, Material=4241ConductorMaterial, Mount="Surface Mount", Packaging="Tape and Reel", Pricing 1="1=0,23, 10=0,148, 50=0,104, 100=0,084, 500=0,06244, 1000=0,05464 (USD)", Radiation Hardening=No, RoHS=Yes, RoHS Compliant=Yes, Series=CL, Stock 1=277343, Supplier 1=Digikey, Thickness=0.055inch, Voltage Rating (DC)=50V, Width=0.049inch
C3 C11 C14 C35 C38 C41: "CAP CER 1uF %10 0805", Capacitance=1uF, Case Code (Metric)=2012, Case Code (Imperial)=0805, Dielectric=X7R, Manufacturer=Samsung, Manufacturer Part Number=CL21B105KBFNNNE, Max Operating Temperature=125°C, Min Operating Temperature=-55°C, Package Quantity=1, Supplier Part Number 1=1276-1029-1-ND, Tolerance=10%, Voltage=50V, Case/Package=0805, Category="Ceramic Capacitors", ComponentLink1Description=https://datasheet.ciiva.com/25800/cl21b105kbfnnne-25800291.pdf?src-supplier=Digikey, ComponentLink1URL=https://datasheet.ciiva.com/25800/cl21b105kbfnnne-25800291.pdf?src-supplier=Digikey, Construction=Flat, Depth=1.25mm, Height=1.25mm, Length=2mm, Material=Ceramic, Mount="Surface Mount", Packaging="Tape and Reel", Pricing 1="1=0,11, 10=0,075, 50=0,045, 100=0,0354, 500=0,02616, 1000=0,02165 (USD)", Radiation Hardening=No, RoHS=Yes, RoHS Compliant=Yes, Series=CL, Stock 1=1550845, Supplier 1=Digikey, Thickness=0.053inch, Voltage Rating=50V, Voltage Rating (DC)=50V, Width=0.049inch
C5 C16 C26 C28: library part "CAP CER 1uF 0805", "CAP CER 1uF %10 0805", Case Code (Metric)=2012, Case Code (Imperial)=0805, Dielectric=X7R, Manufacturer=Samsung, Manufacturer Part Number=CL21B105KBFNNNE, Max Operating Temperature=125°C, Min Operating Temperature=-55°C, Package Quantity=1, Supplier Part Number 1=1276-1029-1-ND, Tolerance=10%, Voltage=50V, Capacitance=1uF, Case/Package=0805, Category="Ceramic Capacitors", ComponentLink1Description=https://datasheet.ciiva.com/25800/cl21b105kbfnnne-25800291.pdf?src-supplier=Digikey, ComponentLink1URL=https://datasheet.ciiva.com/25800/cl21b105kbfnnne-25800291.pdf?src-supplier=Digikey, Construction=Flat, Depth=1.25mm, Height=1.25mm, Length=2mm, Material=Ceramic, Mount="Surface Mount", Packaging="Tape and Reel", Pricing 1="1=0,11, 10=0,075, 50=0,045, 100=0,0354, 500=0,02616, 1000=0,02165 (USD)", Radiation Hardening=No, RoHS=Yes, RoHS Compliant=Yes, Series=CL, Stock 1=1550845, Supplier 1=Digikey, Thickness=0.053inch, Voltage Rating=50V, Voltage Rating (DC)=50V, Width=0.049inch
C6 C12 C17 C20 C21 C22 C23 C25 C29 C30 C31 C32 C33: library part "CAP CER 100nF 0805"
C7 C8: "Cap, 470UF, 50V, Alu Elec, Radial", Manufacturer=KEMET, Supplier Part Number 1=399-15683-ND, ComponentLink1Description=https://api.kemet.com/component-edge/download/datasheet/ESH477M050AH4AA.pdf?src-supplier=Digikey, ComponentLink1URL=https://api.kemet.com/component-edge/download/datasheet/ESH477M050AH4AA.pdf?src-supplier=Digikey, ComponentLink2Description=https://datasheet.octopart.com/ESH477M050AH4AA-KEMET-datasheet-130075338.pdf?src-supplier=Newark, ComponentLink2URL=https://datasheet.octopart.com/ESH477M050AH4AA-KEMET-datasheet-130075338.pdf?src-supplier=Newark, Manufacturer Part Number=ESH477M050AH4AA, Pricing 1="1=0,64, 10=0,432, 200=0,28415, 1000=0,1887, 5000=0,1665, 10000=0,1554 (USD)", RoHS=Yes, Stock 1=10867, Supplier 1=Digikey
C9 C39 C44: library part "CAP CER 10nF 0603", Manufacturer="Walsin Technologies", Manufacturer Part Number=0603B103K160CT, Supplier Part Number 1=1292-1384-1-ND, Category="Ceramic Capacitors", ComponentLink1Description=http://www.farnell.com/datasheets/1958513.pdf?src-supplier=Farnell, ComponentLink1URL=http://www.farnell.com/datasheets/1958513.pdf?src-supplier=Farnell, ComponentLink2Description=https://datasheet.octopart.com/0603B103K160CT-Walsin-Technologies-datasheet-136037192.pdf?src-supplier=Future+Electronics, ComponentLink2URL=https://datasheet.octopart.com/0603B103K160CT-Walsin-Technologies-datasheet-136037192.pdf?src-supplier=Future+Electronics, ComponentLink3Description=http://www.passivecomponent.com/wp-content/uploads/2018/10/MLCC.pdf?src-supplier=Digikey, ComponentLink3URL=http://www.passivecomponent.com/wp-content/uploads/2018/10/MLCC.pdf?src-supplier=Digikey, ComponentLink4Description=https://datasheet.octopart.com/0603B103K160CT-Walsin-Technologies-datasheet-85392065.pdf?src-supplier=Element14, ComponentLink4URL=https://datasheet.octopart.com/0603B103K160CT-Walsin-Technologies-datasheet-85392065.pdf?src-supplier=Element14, ComponentLink5Description=https://datasheet.octopart.com/0603B103K160CT-Walsin-Technologies-datasheet-62066062.pdf?src-supplier=TME, ComponentLink5URL=https://datasheet.octopart.com/0603B103K160CT-Walsin-Technologies-datasheet-62066062.pdf?src-supplier=TME, Lead Free=5697LeadFree, Pricing 1="1=0,1, 10=0,032, 50=0,0182, 100=0,0141, 500=0,0106, 1000=0,00833 (USD)", RoHS=Yes, Stock 1=97748, Supplier 1=Digikey
C10: library part "CAP ALU 68 uF", "Cap Aluminum Lytic 68uF 35V 20%( 6.3 X 7.7mm) SMD 0.34 Ohm 280mA 2000h 105C T/R", Manufacturer=KEMET, Manufacturer Part Number=EEV686M035A9HAA, Supplier Part Number 1=399-6722-1-ND, Category="Aluminum Electrolytic Capacitors", ComponentLink1Description=https://datasheet.ciiva.com/5365/kem-a4002-eev-535332-5365784.pdf?src-supplier=Mouser, ComponentLink1URL=https://datasheet.ciiva.com/5365/kem-a4002-eev-535332-5365784.pdf?src-supplier=Mouser, Pricing 1="1=0,59, 10=0,394, 50=0,3134, 100=0,2588, 500=0,2022 (USD)", RoHS=Yes, Stock 1=22813, Supplier 1=Digikey
C13 C15 C27: Capacitance=4.7uF, Case Code (Metric)=2012, Case Code (Imperial)=0805, Dielectric=X5R, Manufacturer=Samsung, Manufacturer Part Number=CL21A475KBQNNNE, Max Operating Temperature=85°C, Min Operating Temperature=-55°C, Package Quantity=1, Supplier Part Number 1=1276-1248-1-ND, Tolerance=10%, Voltage Rating=50V, Case/Package=0805, Category="Ceramic Capacitors", ComponentLink1Description=https://datasheet.ciiva.com/25797/cl21a475kbqnnne-25797730.pdf?src-supplier=Digikey, ComponentLink1URL=https://datasheet.ciiva.com/25797/cl21a475kbqnnne-25797730.pdf?src-supplier=Digikey, ComponentLink2Description=https://datasheet.ciiva.com/16428/cl21a475kbqnnne-16428877.pdf?src-supplier=Future+Electronics, ComponentLink2URL=https://datasheet.ciiva.com/16428/cl21a475kbqnnne-16428877.pdf?src-supplier=Future+Electronics, ComponentLink3Description=https://datasheet.ciiva.com/26838/getdatasheetpartid-470982-26838620.pdf?src-supplier=Verical, ComponentLink3URL=https://datasheet.ciiva.com/26838/getdatasheetpartid-470982-26838620.pdf?src-supplier=Verical, Depth=1.25mm, Length=2mm, Material=4241ConductorMaterial, Mount="Surface Mount", Packaging="Tape and Reel", Pricing 1="1=0,23, 10=0,148, 50=0,104, 100=0,084, 500=0,06244, 1000=0,05464 (USD)", Radiation Hardening=No, RoHS=Yes, RoHS Compliant=Yes, Series=CL, Stock 1=277343, Supplier 1=Digikey, Thickness=0.055inch, Voltage Rating (DC)=50V, Width=0.049inch
C18 C19: library part "CAP CER 20 pF 0603"
C24: library part "CAP ALU ELEC 470 uF 50V", "Cap, 470UF, 50V, Alu Elec, Radial", Manufacturer=KEMET, Supplier Part Number 1=399-15683-ND, ComponentLink1Description=https://api.kemet.com/component-edge/download/datasheet/ESH477M050AH4AA.pdf?src-supplier=Digikey, ComponentLink1URL=https://api.kemet.com/component-edge/download/datasheet/ESH477M050AH4AA.pdf?src-supplier=Digikey, ComponentLink2Description=https://datasheet.octopart.com/ESH477M050AH4AA-KEMET-datasheet-130075338.pdf?src-supplier=Newark, ComponentLink2URL=https://datasheet.octopart.com/ESH477M050AH4AA-KEMET-datasheet-130075338.pdf?src-supplier=Newark, Manufacturer Part Number=ESH477M050AH4AA, Pricing 1="1=0,64, 10=0,432, 200=0,28415, 1000=0,1887, 5000=0,1665, 10000=0,1554 (USD)", RoHS=Yes, Stock 1=12377, Supplier 1=Digikey
C40 C43 C46 C47: "Multilayer Ceramic Capacitor, 0.1 uF, 50 V, ± 10%, X7R, 0603 [1608 Metric]", Capacitance=100nF, Case/Package=0603, Dielectric=X7R, Manufacturer=KEMET, Manufacturer Part Number=C0603C104K5RACTU, Max Operating Temperature=125°C, Min Operating Temperature=-55°C, Supplier Part Number 1=399-C0603C104K5RAC7867CT-ND, Temperature Coefficient=30ppm/°C, Tolerance=10%, Voltage=50V, Category="Ceramic Capacitors", ComponentLink1Description=https://datasheet.ciiva.com/46444/1769893-46444984.pdf?src-supplier=Element14, ComponentLink1URL=https://datasheet.ciiva.com/46444/1769893-46444984.pdf?src-supplier=Element14, ComponentLink2Description=https://datasheet.ciiva.com/46444/1769893-46444985.pdf?src-supplier=Element14, ComponentLink2URL=https://datasheet.ciiva.com/46444/1769893-46444985.pdf?src-supplier=Element14, ComponentLink3Description=https://datasheet.ciiva.com/14906/partnumbering-e-01-14906427.pdf?src-supplier=Digikey, ComponentLink3URL=https://datasheet.ciiva.com/14906/partnumbering-e-01-14906427.pdf?src-supplier=Digikey, ComponentLink4Description=https://datasheet.ciiva.com/14906/partnumbering-e-01-14906426.pdf?src-supplier=Digikey, ComponentLink4URL=https://datasheet.ciiva.com/14906/partnumbering-e-01-14906426.pdf?src-supplier=Digikey, ComponentLink5Description=https://datasheet.ciiva.com/14906/partnumbering-e-01-14906428.pdf?src-supplier=Digikey, ComponentLink5URL=https://datasheet.ciiva.com/14906/partnumbering-e-01-14906428.pdf?src-supplier=Digikey, ComponentLink6Description=https://datasheet.octopart.com/C0603C104K5RACTU-KEMET-datasheet-176142159.pdf?src-supplier=Farnell, ComponentLink6URL=https://datasheet.octopart.com/C0603C104K5RACTU-KEMET-datasheet-176142159.pdf?src-supplier=Farnell, ComponentLink7Description=https://datasheet.octopart.com/C0603C104K5RACTU-KEMET-datasheet-149521864.pdf?src-supplier=Farnell, ComponentLink7URL=https://datasheet.octopart.com/C0603C104K5RACTU-KEMET-datasheet-149521864.pdf?src-supplier=Farnell, ComponentLink8Description=https://datasheet.octopart.com/C0603C104K5RACTU-KEMET-datasheet-101575654.pdf?src-supplier=Farnell, ComponentLink8URL=https://datasheet.octopart.com/C0603C104K5RACTU-KEMET-datasheet-101575654.pdf?src-supplier=Farnell, ComponentLink9Description=https://datasheet.octopart.com/C0603C104K5RAC-TU-Kemet-datasheet-7833651.pdf?src-supplier=Farnell, ComponentLink9URL=https://datasheet.octopart.com/C0603C104K5RAC-TU-Kemet-datasheet-7833651.pdf?src-supplier=Farnell, ComponentLink10Description=https://datasheet.octopart.com/C0603C104K5RAC-TU-Kemet-datasheet-7601896.pdf?src-supplier=Farnell, ComponentLink10URL=https://datasheet.octopart.com/C0603C104K5RAC-TU-Kemet-datasheet-7601896.pdf?src-supplier=Farnell, ComponentLink11Description=https://datasheet.octopart.com/C0603C104K5RAC-TU-Kemet-datasheet-5316294.pdf?src-supplier=Farnell, ComponentLink11URL=https://datasheet.octopart.com/C0603C104K5RAC-TU-Kemet-datasheet-5316294.pdf?src-supplier=Farnell, ComponentLink12Description=https://datasheet.octopart.com/C0603C104K5RAC-TU-Kemet-datasheet-5314837.pdf?src-supplier=Farnell, ComponentLink12URL=https://datasheet.octopart.com/C0603C104K5RAC-TU-Kemet-datasheet-5314837.pdf?src-supplier=Farnell, ComponentLink13Description=https://datasheet.octopart.com/C0603C104K5RAC-TU-Kemet-datasheet-8092359.pdf?src-supplier=Farnell, ComponentLink13URL=https://datasheet.octopart.com/C0603C104K5RAC-TU-Kemet-datasheet-8092359.pdf?src-supplier=Farnell, ComponentLink14Description=https://datasheet.octopart.com/C0603C104K5RAC-TU-Kemet-datasheet-5314449.pdf?src-supplier=Farnell, ComponentLink14URL=https://datasheet.octopart.com/C0603C104K5RAC-TU-Kemet-datasheet-5314449.pdf?src-supplier=Farnell, ComponentLink15Description=https://datasheet.octopart.com/C0603C104K5RAC-TU-Kemet-datasheet-5314969.pdf?src-supplier=Farnell, ComponentLink15URL=https://datasheet.octopart.com/C0603C104K5RAC-TU-Kemet-datasheet-5314969.pdf?src-supplier=Farnell, ComponentLink16Description=https://datasheet.octopart.com/C0603C104K5RAC-TU-Kemet-datasheet-5314627.pdf?src-supplier=Farnell, ComponentLink16URL=https://datasheet.octopart.com/C0603C104K5RAC-TU-Kemet-datasheet-5314627.pdf?src-supplier=Farnell, ComponentLink17Description=https://datasheet.octopart.com/C0603C104K5RAC-TU-Kemet-datasheet-5389132.pdf?src-supplier=Farnell, ComponentLink17URL=https://datasheet.octopart.com/C0603C104K5RAC-TU-Kemet-datasheet-5389132.pdf?src-supplier=Farnell, ComponentLink18Description=https://datasheet.octopart.com/C0603C104K5RAC-TU-Kemet-datasheet-5313836.pdf?src-supplier=Farnell, ComponentLink18URL=https://datasheet.octopart.com/C0603C104K5RAC-TU-Kemet-datasheet-5313836.pdf?src-supplier=Farnell, ComponentLink19Description=https://datasheet.octopart.com/C0603C104K5RAC-TU-Kemet-datasheet-8111010.pdf?src-supplier=Farnell, ComponentLink19URL=https://datasheet.octopart.com/C0603C104K5RAC-TU-Kemet-datasheet-8111010.pdf?src-supplier=Farnell, ComponentLink20Description=https://datasheet.octopart.com/C0603C104K5RAC-TU-Kemet-datasheet-7627733.pdf?src-supplier=Farnell, ComponentLink20URL=https://datasheet.octopart.com/C0603C104K5RAC-TU-Kemet-datasheet-7627733.pdf?src-supplier=Farnell, ComponentLink21Description=https://datasheet.octopart.com/C0603C104K5RAC-TU-Kemet-datasheet-5315946.pdf?src-supplier=Farnell, ComponentLink21URL=https://datasheet.octopart.com/C0603C104K5RAC-TU-Kemet-datasheet-5315946.pdf?src-supplier=Farnell, ComponentLink22Description=https://datasheet.octopart.com/C0603C104K5RACTU-KEMET-datasheet-171829795.pdf?src-supplier=Newark, ComponentLink22URL=https://datasheet.octopart.com/C0603C104K5RACTU-KEMET-datasheet-171829795.pdf?src-supplier=Newark, ComponentLink23Description=https://datasheet.octopart.com/C0603C104K5RAC-TU-Kemet-datasheet-5313890.pdf?src-supplier=Newark, ComponentLink23URL=https://datasheet.octopart.com/C0603C104K5RAC-TU-Kemet-datasheet-5313890.pdf?src-supplier=Newark, ComponentLink24Description=https://datasheet.octopart.com/C0603C104K5RACTU-Kemet-datasheet-12608295.pdf?src-supplier=Newark, ComponentLink24URL=https://datasheet.octopart.com/C0603C104K5RACTU-Kemet-datasheet-12608295.pdf?src-supplier=Newark, ComponentLink25Description=https://datasheet.octopart.com/C0603C104K5RACTU-Kemet-datasheet-11992184.pdf?src-supplier=Newark, ComponentLink25URL=https://datasheet.octopart.com/C0603C104K5RACTU-Kemet-datasheet-11992184.pdf?src-supplier=Newark, ComponentLink26Description=https://datasheet.octopart.com/C0603C104K5RACTU-Kemet-datasheet-10942409.pdf?src-supplier=Newark, ComponentLink26URL=https://datasheet.octopart.com/C0603C104K5RACTU-Kemet-datasheet-10942409.pdf?src-supplier=Newark, ComponentLink27Description=https://datasheet.octopart.com/C0603C104K5RACTU-Kemet-datasheet-10404442.pdf?src-supplier=Newark, ComponentLink27URL=https://datasheet.octopart.com/C0603C104K5RACTU-Kemet-datasheet-10404442.pdf?src-supplier=Newark, ComponentLink28Description=https://datasheet.octopart.com/C0603C104K5RAC-TU-Kemet-datasheet-5390537.pdf?src-supplier=Newark, ComponentLink28URL=https://datasheet.octopart.com/C0603C104K5RAC-TU-Kemet-datasheet-5390537.pdf?src-supplier=Newark, ComponentLink29Description=https://datasheet.octopart.com/C0603C104K5RAC-TU-Kemet-datasheet-7541751.pdf?src-supplier=Newark, ComponentLink29URL=https://datasheet.octopart.com/C0603C104K5RAC-TU-Kemet-datasheet-7541751.pdf?src-supplier=Newark, ComponentLink30Description=https://datasheet.octopart.com/C0603C104K5RACTU-Kemet-datasheet-8764837.pdf?src-supplier=Newark, ComponentLink30URL=https://datasheet.octopart.com/C0603C104K5RACTU-Kemet-datasheet-8764837.pdf?src-supplier=Newark, ComponentLink31Description=https://datasheet.octopart.com/C0603C104K5RACTU-Kemet-datasheet-8480123.pdf?src-supplier=Newark, ComponentLink31URL=https://datasheet.octopart.com/C0603C104K5RACTU-Kemet-datasheet-8480123.pdf?src-supplier=Newark, ComponentLink32Description=https://datasheet.octopart.com/C0603C104K5RACTU-Kemet-datasheet-5393970.pdf?src-supplier=Newark, ComponentLink32URL=https://datasheet.octopart.com/C0603C104K5RACTU-Kemet-datasheet-5393970.pdf?src-supplier=Newark, ComponentLink33Description=https://datasheet.octopart.com/C0603C104K5RACTU-Kemet-datasheet-8502025.pdf?src-supplier=Newark, ComponentLink33URL=https://datasheet.octopart.com/C0603C104K5RACTU-Kemet-datasheet-8502025.pdf?src-supplier=Newark, ComponentLink34Description=https://datasheet.octopart.com/C0603C104K5RACTU-Kemet-datasheet-161801.pdf?src-supplier=Newark, ComponentLink34URL=https://datasheet.octopart.com/C0603C104K5RACTU-Kemet-datasheet-161801.pdf?src-supplier=Newark, ComponentLink35Description=https://datasheet.octopart.com/C0603C104K5RACTU-Kemet-datasheet-32036385.pdf?src-supplier=Electro+Sonic, ComponentLink35URL=https://datasheet.octopart.com/C0603C104K5RACTU-Kemet-datasheet-32036385.pdf?src-supplier=Electro+Sonic, ComponentLink36Description=https://datasheet.octopart.com/C0603C104K5RACTU-KEMET-datasheet-157246124.pdf?src-supplier=Electro+Sonic, ComponentLink36URL=https://datasheet.octopart.com/C0603C104K5RACTU-KEMET-datasheet-157246124.pdf?src-supplier=Electro+Sonic, ComponentLink37Description=https://datasheet.octopart.com/C0603C104K5RACTU-KEMET-datasheet-164512540.pdf?src-supplier=TME, ComponentLink37URL=https://datasheet.octopart.com/C0603C104K5RACTU-KEMET-datasheet-164512540.pdf?src-supplier=TME, ComponentLink38Description=https://datasheet.octopart.com/C0603C104K5RACTU-Kemet-datasheet-67830781.pdf?src-supplier=TME, ComponentLink38URL=https://datasheet.octopart.com/C0603C104K5RACTU-Kemet-datasheet-67830781.pdf?src-supplier=TME, ComponentLink39Description=https://datasheet.octopart.com/C0603C104K5RACTU-KEMET-datasheet-68331906.pdf?src-supplier=TME, ComponentLink39URL=https://datasheet.octopart.com/C0603C104K5RACTU-KEMET-datasheet-68331906.pdf?src-supplier=TME, ComponentLink40Description=https://datasheet.octopart.com/C0603C104K5RAC7867-Kemet-datasheet-62098571.pdf?src-supplier=TME, ComponentLink40URL=https://datasheet.octopart.com/C0603C104K5RAC7867-Kemet-datasheet-62098571.pdf?src-supplier=TME, ComponentLink41Description=https://datasheet.octopart.com/C0603C104K5RAC7867-Kemet-datasheet-17577222.pdf?src-supplier=TME, ComponentLink41URL=https://datasheet.octopart.com/C0603C104K5RAC7867-Kemet-datasheet-17577222.pdf?src-supplier=TME, ComponentLink42Description=https://datasheet.octopart.com/C0603C104K5RACTU-KEMET-datasheet-137357759.pdf?src-supplier=Upverter, ComponentLink42URL=https://datasheet.octopart.com/C0603C104K5RACTU-KEMET-datasheet-137357759.pdf?src-supplier=Upverter, ComponentLink43Description=https://datasheet.octopart.com/C0603C104K5RACTU-KEMET-datasheet-137357764.pdf?src-supplier=Upverter, ComponentLink43URL=https://datasheet.octopart.com/C0603C104K5RACTU-KEMET-datasheet-137357764.pdf?src-supplier=Upverter, ComponentLink44Description=https://datasheet.octopart.com/C0603C104K5RACTU-KEMET-datasheet-110724412.pdf?src-supplier=RS+(Formerly+Allied+Electronics), ComponentLink44URL=https://datasheet.octopart.com/C0603C104K5RACTU-KEMET-datasheet-110724412.pdf?src-supplier=RS+(Formerly+Allied+Electronics), ComponentLink45Description=https://datasheet.octopart.com/C0603C104K5RACTU-Kemet-datasheet-464.pdf?src-supplier=RS+(Formerly+Allied+Electronics), ComponentLink45URL=https://datasheet.octopart.com/C0603C104K5RACTU-Kemet-datasheet-464.pdf?src-supplier=RS+(Formerly+Allied+Electronics), ComponentLink46Description=https://datasheet.octopart.com/C0603C104K5RACTU-KEMET-datasheet-84169754.pdf, ComponentLink46URL=https://datasheet.octopart.com/C0603C104K5RACTU-KEMET-datasheet-84169754.pdf, ComponentLink47Description=https://datasheet.octopart.com/C0603C104K5RACTU-Kemet-datasheet-24570007.pdf?src-supplier=Element14, ComponentLink47URL=https://datasheet.octopart.com/C0603C104K5RACTU-Kemet-datasheet-24570007.pdf?src-supplier=Element14, ComponentLink48Description=https://datasheet.octopart.com/C0603C104K5RACTU-Kemet-datasheet-22084244.pdf?src-supplier=Element14, ComponentLink48URL=https://datasheet.octopart.com/C0603C104K5RACTU-Kemet-datasheet-22084244.pdf?src-supplier=Element14, ComponentLink49Description=https://datasheet.octopart.com/C0603C104K5RACTU-Kemet-datasheet-21389238.pdf?src-supplier=Element14, ComponentLink49URL=https://datasheet.octopart.com/C0603C104K5RACTU-Kemet-datasheet-21389238.pdf?src-supplier=Element14, ComponentLink50Description=https://datasheet.octopart.com/C0603C104K5RACTU-Kemet-datasheet-11723057.pdf?src-supplier=Arrow+Electronics, ComponentLink50URL=https://datasheet.octopart.com/C0603C104K5RACTU-Kemet-datasheet-11723057.pdf?src-supplier=Arrow+Electronics, ComponentLink51Description=https://datasheet.octopart.com/C0603C104K5RAC7867-KEMET-datasheet-164857143.pdf?src-supplier=Burklin+Elektronik, ComponentLink51URL=https://datasheet.octopart.com/C0603C104K5RAC7867-KEMET-datasheet-164857143.pdf?src-supplier=Burklin+Elektronik, ComponentLink52Description=https://datasheet.octopart.com/C0603C104K5RAC-TU-Kemet-datasheet-8187850.pdf?src-supplier=Jameco, ComponentLink52URL=https://datasheet.octopart.com/C0603C104K5RAC-TU-Kemet-datasheet-8187850.pdf?src-supplier=Jameco, ComponentLink53Description=https://datasheet.octopart.com/C0603C104K5RACTU-Kemet-datasheet-122295.pdf?src-supplier=Digikey, ComponentLink53URL=https://datasheet.octopart.com/C0603C104K5RACTU-Kemet-datasheet-122295.pdf?src-supplier=Digikey, Lead Free=5697LeadFree, Length=0.063inch, Material=4241ConductorMaterial, Mount="Surface Mount", Packaging="Tape and Reel", Pricing 1="1=0,11, 10=0,074, 50=0,0424, 100=0,0329, 500=0,02474, 1000=0,01944 (USD)", RoHS Compliant=Yes, Series="SMD Comm X7R", Stock 1=3473994, Supplier 1=Digikey, Thickness=0.034inch, Voltage Rating=50V, Width=0.031inch
C42 C45: library part "CAP CER 33 uF 1206"
D1 D2 D3 D4 D7: "Diode Ultra Fast Recovery Rectifier 75V 0.15A 2-Pin SOD-323F T/R", Average Rectified Current=150mA, Capacitance=4pF, Manufacturer="ON Semiconductor / Fairchild", Max Forward Surge Current (Ifsm)=2A, Max Operating Temperature=150°C, Max Repetitive Reverse Voltage (Vrrm)=75V, Max Reverse Current=5uA, Min Operating Temperature=-55°C, Package Quantity=1, Supplier Part Number 1=1N4148WSFSCT-ND, Category="Rectifier Diodes", ComponentLink1Description=https://datasheet.ciiva.com/15208/getdatasheetpartid-127819-15208358.pdf?src-supplier=Verical, ComponentLink1URL=https://datasheet.ciiva.com/15208/getdatasheetpartid-127819-15208358.pdf?src-supplier=Verical, ComponentLink2Description=https://datasheet.ciiva.com/8300/1n914bws-8300360.pdf?src-supplier=Avnet, ComponentLink2URL=https://datasheet.ciiva.com/8300/1n914bws-8300360.pdf?src-supplier=Avnet, ComponentLink3Description=https://datasheet.ciiva.com/910/1n4148ws-910381.pdf?src-supplier=Digikey, ComponentLink3URL=https://datasheet.ciiva.com/910/1n4148ws-910381.pdf?src-supplier=Digikey, Element Configuration=Single, Forward Current=150mA, Height=1mm, Lead Free="Lead Free", Length=1.8mm, Manufacturer Part Number=1N4148WS, Max Reverse Voltage (DC)=75V, Mount="Surface Mount", Number of Pins=2, Packaging="Tape and Reel", Pricing 1="1=0,19, 10=0,136, 100=0,0733, 500=0,0576, 1000=0,04 (USD)", Radiation Hardening=No, Reach SVHC Compliant=No, Recovery Time=4ns, Reverse Recovery Time=4ns, Reverse Voltage=75V, RoHS=Yes, RoHS Compliant=Yes, Series=-, Stock 1=807861, Supplier 1=Digikey, Weight=0.0276g, Width=1.35mm
D6: "Vz=5.6V 5.32V~5.88V Izt=66.9mA", Manufacturer="ON Semiconductor", Supplier Part Number 1=1SMB5919BT3GOSCT-ND, Category="Zener Diodes", ComponentLink1Description=https://datasheet.ciiva.com/27747/1308331-27747654.pdf?src-supplier=Jameco, ComponentLink1URL=https://datasheet.ciiva.com/27747/1308331-27747654.pdf?src-supplier=Jameco, ComponentLink2Description=https://datasheet.ciiva.com/1182/1smb5913bt3-d-1182657.pdf?src-supplier=Element14, ComponentLink2URL=https://datasheet.ciiva.com/1182/1smb5913bt3-d-1182657.pdf?src-supplier=Element14, ComponentLink3Description=https://datasheet.ciiva.com/1182/1smb5913bt3-d-1182658.pdf?src-supplier=Element14, ComponentLink3URL=https://datasheet.ciiva.com/1182/1smb5913bt3-d-1182658.pdf?src-supplier=Element14, ComponentLink4Description=https://datasheet.ciiva.com/895/1smb5913bt3-d-895203.pdf?src-supplier=Digikey, ComponentLink4URL=https://datasheet.ciiva.com/895/1smb5913bt3-d-895203.pdf?src-supplier=Digikey, ComponentLink5Description=https://datasheet.ciiva.com/895/1smb5913bt3-d-895204.pdf?src-supplier=Digikey, ComponentLink5URL=https://datasheet.ciiva.com/895/1smb5913bt3-d-895204.pdf?src-supplier=Digikey, ComponentLink6Description=https://datasheet.ciiva.com/895/1smb5913bt3-d-895205.pdf?src-supplier=Digikey, ComponentLink6URL=https://datasheet.ciiva.com/895/1smb5913bt3-d-895205.pdf?src-supplier=Digikey, ComponentLink7Description=https://datasheet.ciiva.com/15198/getdatasheetpartid-311040-15198695.pdf?src-supplier=Verical, ComponentLink7URL=https://datasheet.ciiva.com/15198/getdatasheetpartid-311040-15198695.pdf?src-supplier=Verical, ComponentLink8Description=https://datasheet.ciiva.com/16311/1smb5913bt3-d-16311847.pdf?src-supplier=Future+Electronics, ComponentLink8URL=https://datasheet.ciiva.com/16311/1smb5913bt3-d-16311847.pdf?src-supplier=Future+Electronics, Manufacturer Part Number=1SMB5919BT3G, Pricing 1="1=0,48, 10=0,341, 100=0,1722, 500=0,15262, 1000=0,11878 (USD)", RoHS=Yes, Stock 1=209, Supplier 1=Digikey
F1: "Fuse Chip Fast Acting 1A 32V SMD Solder Pad 1206 Glass T/R VDE/cULus", Case Code (Metric)=3216, Case Code (Imperial)=1206, Current Rating=1A, DC Cold Resistance=94.2mR, Manufacturer=Schurter, Manufacturer Part Number=3413.0216.22, Max Operating Temperature=90°C, Min Operating Temperature=-55°C, Package Quantity=1000, Supplier Part Number 1=486-1144-1-ND, Voltage Rating=32V, Voltage Rating (DC)=63V, Approvals=VDE,cURus, Body Material=Glass,Epoxy, Case/Package=1206, Category=Fuses, ComponentLink1Description=https://datasheet.ciiva.com/301/typ-usi-1206-301440.pdf?src-supplier=Digikey, ComponentLink1URL=https://datasheet.ciiva.com/301/typ-usi-1206-301440.pdf?src-supplier=Digikey, ComponentLink2Description=https://datasheet.ciiva.com/8264/typ-usi-1206-8264583.pdf?src-supplier=Avnet, ComponentLink2URL=https://datasheet.ciiva.com/8264/typ-usi-1206-8264583.pdf?src-supplier=Avnet, ComponentLink3Description=https://datasheet.ciiva.com/16316/typ-usi-1206-16316588.pdf?src-supplier=Future+Electronics, ComponentLink3URL=https://datasheet.ciiva.com/16316/typ-usi-1206-16316588.pdf?src-supplier=Future+Electronics, ComponentLink4Description=https://datasheet.ciiva.com/301/typ-usi-1206-301439.pdf?src-supplier=Digikey, ComponentLink4URL=https://datasheet.ciiva.com/301/typ-usi-1206-301439.pdf?src-supplier=Digikey, ComponentLink5Description=https://datasheet.ciiva.com/14541/70160006-14541114.pdf?src-supplier=Allied+Electronics, ComponentLink5URL=https://datasheet.ciiva.com/14541/70160006-14541114.pdf?src-supplier=Allied+Electronics, ComponentLink6Description=https://datasheet.ciiva.com/14102/qousi1206-data-e-14102903.pdf?src-supplier=Distrelec, ComponentLink6URL=https://datasheet.ciiva.com/14102/qousi1206-data-e-14102903.pdf?src-supplier=Distrelec, ComponentLink7Description=https://datasheet.ciiva.com/301/typ-usi-1206-301441.pdf?src-supplier=Digikey, ComponentLink7URL=https://datasheet.ciiva.com/301/typ-usi-1206-301441.pdf?src-supplier=Digikey, Contact Plating=Gold, Designed by=Nisanur, Fuse Type="Board Mount (Cartridge Style Excluded)", Height=0.6mm, Lead Free="Lead Free", Length=3.2mm, Mount="Surface Mount,PCB", Number of Pins=2, Packaging="Tape and Reel", Pricing 1="1=0,67, 50=0,524, 100=0,397, 500=0,345 (USD)", RoHS=Yes, RoHS Compliant=Yes, Series="USI 1206", Stock 1=15097, Supplier 1=Digikey, Terminal Material=Tin, Termination=SMD/SMT, Voltage Rating (AC)=32V, Weight=0.000212oz, Width=1.6mm, Working Voltage=32V
J1 J2 J5: "2~24 Poles, Pluggable, Receptacle, Horizontal, 5.08 Pitch, Terminal Block Connector", Manufacturer="CUI Devices", Supplier Part Number 1=102-6406-ND, Category="Terminal Blocks", ComponentLink1Description=https://www.cuidevices.com/product/resource/digikeypdf/tbp01r1-508.pdf?src-supplier=Digikey, ComponentLink1URL=https://www.cuidevices.com/product/resource/digikeypdf/tbp01r1-508.pdf?src-supplier=Digikey, ComponentLink2Description=https://datasheet.octopart.com/TBP01R1-508-02BE-CUI-Devices-datasheet-147843976.pdf?src-supplier=Future+Electronics, ComponentLink2URL=https://datasheet.octopart.com/TBP01R1-508-02BE-CUI-Devices-datasheet-147843976.pdf?src-supplier=Future+Electronics, ComponentLink3Description=https://datasheet.octopart.com/TBP01R1-508-02BE-CUI-Devices-datasheet-154730754.pdf?src-supplier=Electro+Sonic, ComponentLink3URL=https://datasheet.octopart.com/TBP01R1-508-02BE-CUI-Devices-datasheet-154730754.pdf?src-supplier=Electro+Sonic, Manufacturer Part Number=TBP01R1-508-02BE, Pricing 1="1=0,48, 10=0,252, 25=0,1788, 50=0,152, 100=0,1466, 250=0,12396, 500=0,11464, 1000=0,10131, 5000=0,07731 (USD)", RoHS=Yes, Stock 1=103835, Supplier 1=Digikey
J6 J8: library part 64800611622_conn_6pin, "1.50 mm, 6 pin connector", Manufacturer="Wurth Electronics", Supplier Part Number 1=732-64800611622-ND, Category=Uncategorized, Manufacturer Part Number=64800611622, Pricing 1="1=0,42, 50=0,406, 100=0,384, 250=0,361, 500=0,339 (USD)", RoHS=No, Stock 1=589, Supplier 1=Digikey